# EAGLE board SIH26113_Maternity_Assist_Belt (EAGLE 9.6.2), part 1 of 2
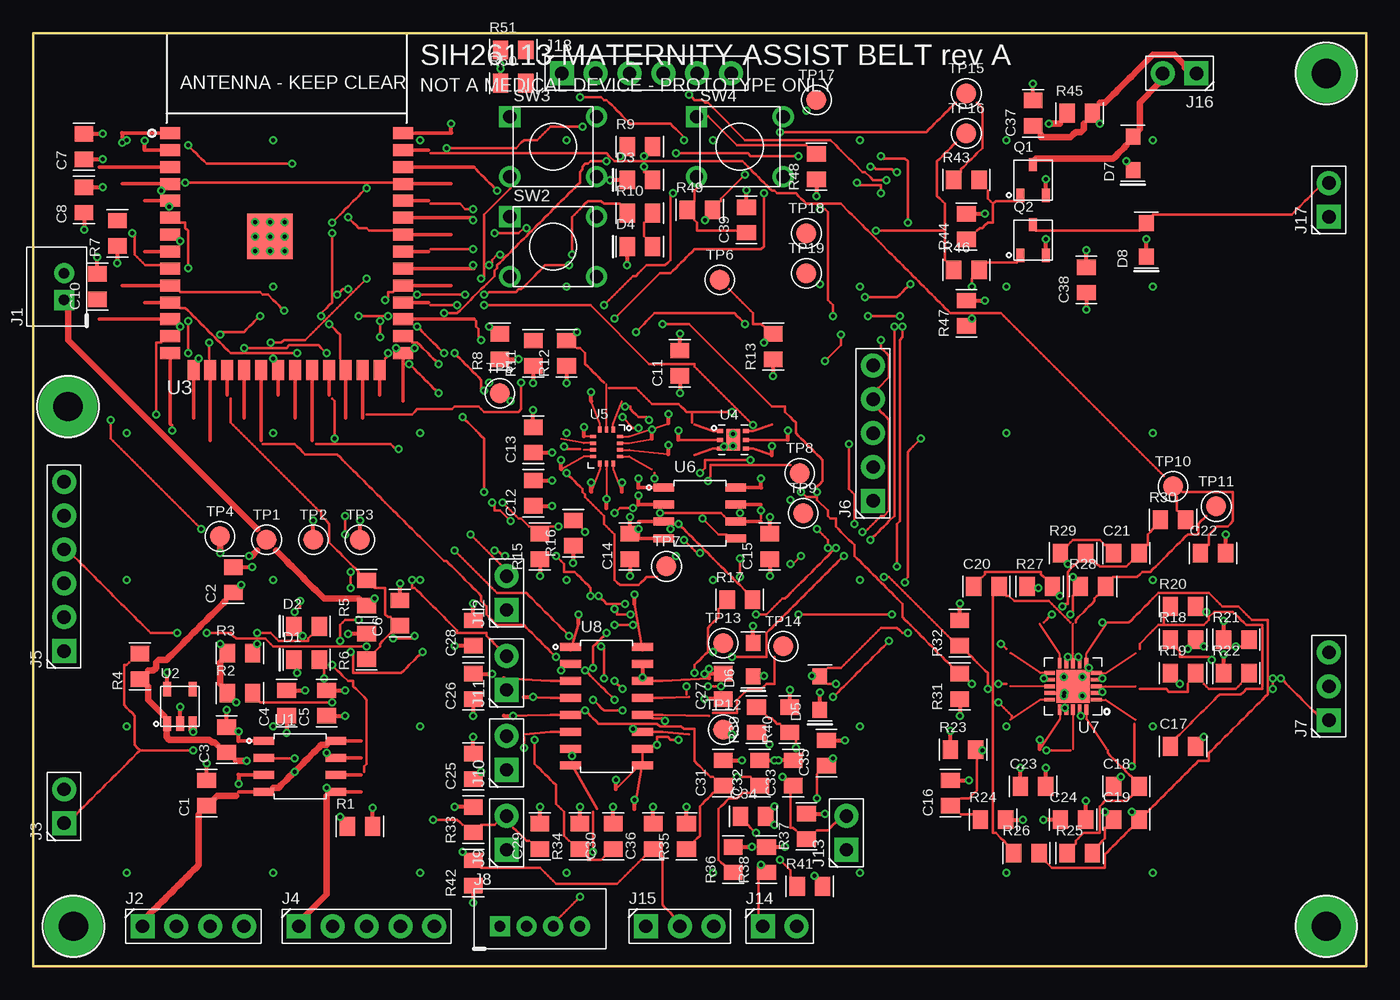
[diagram p0: board, top side]
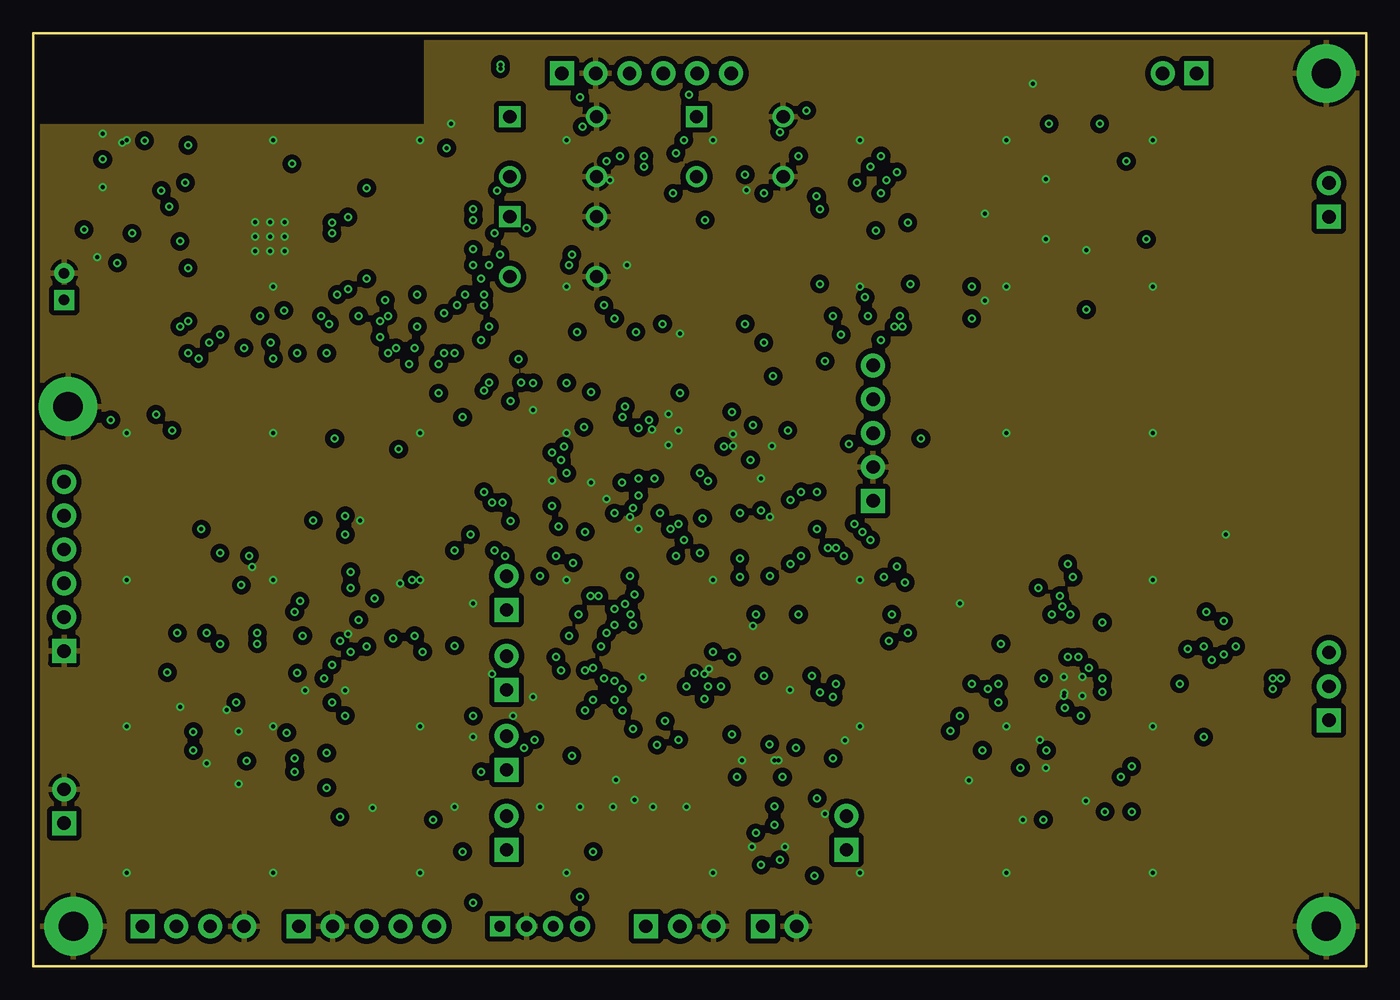
[diagram p1: board, inner layer Route2]
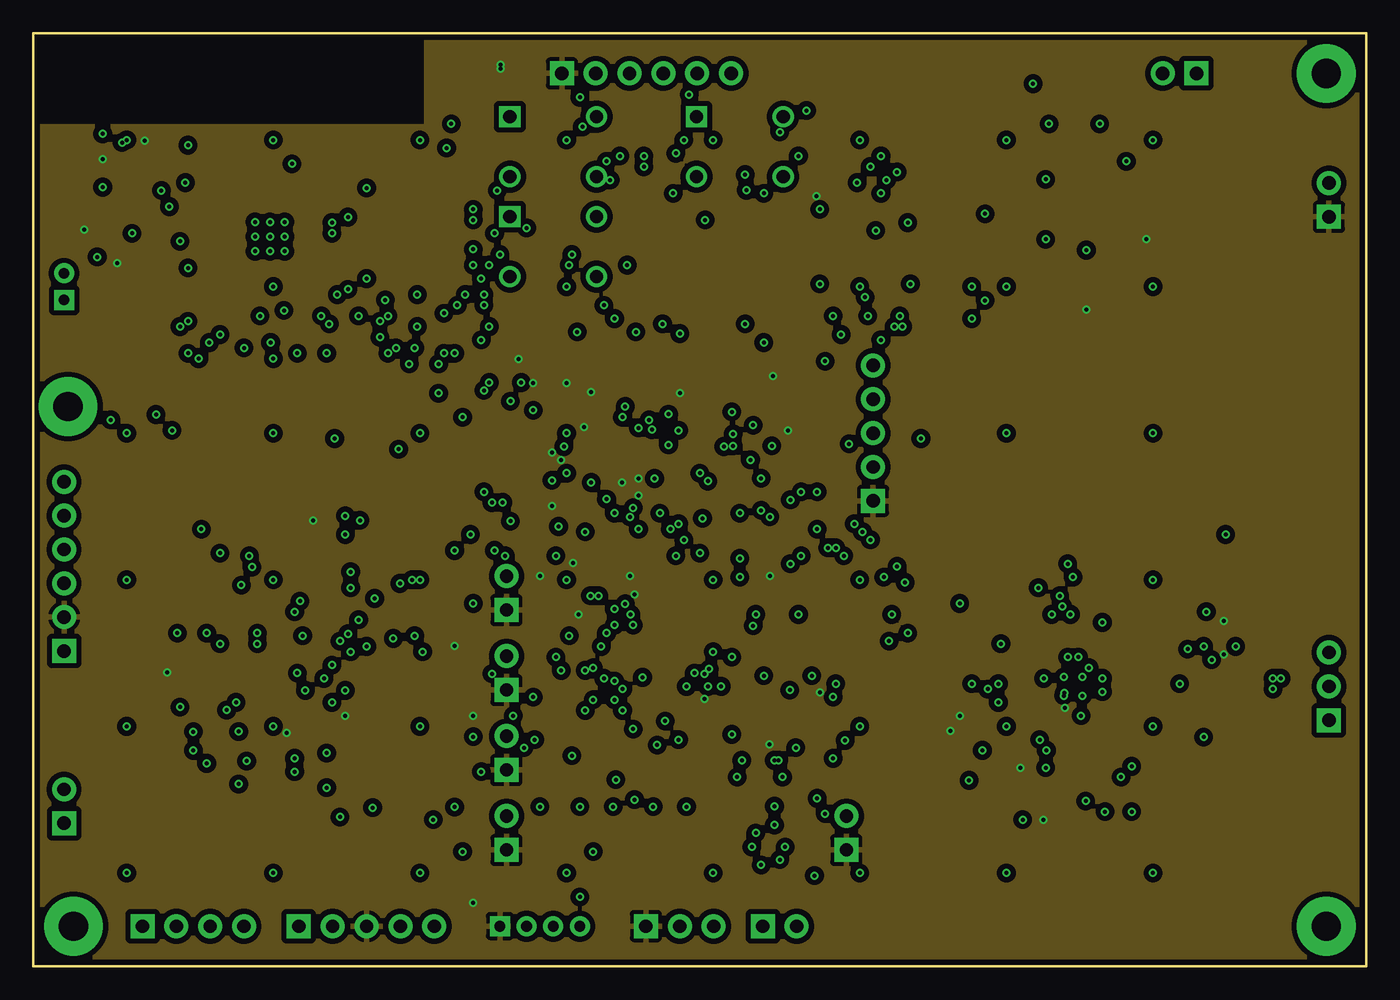
[diagram p2: board, inner layer Route15]
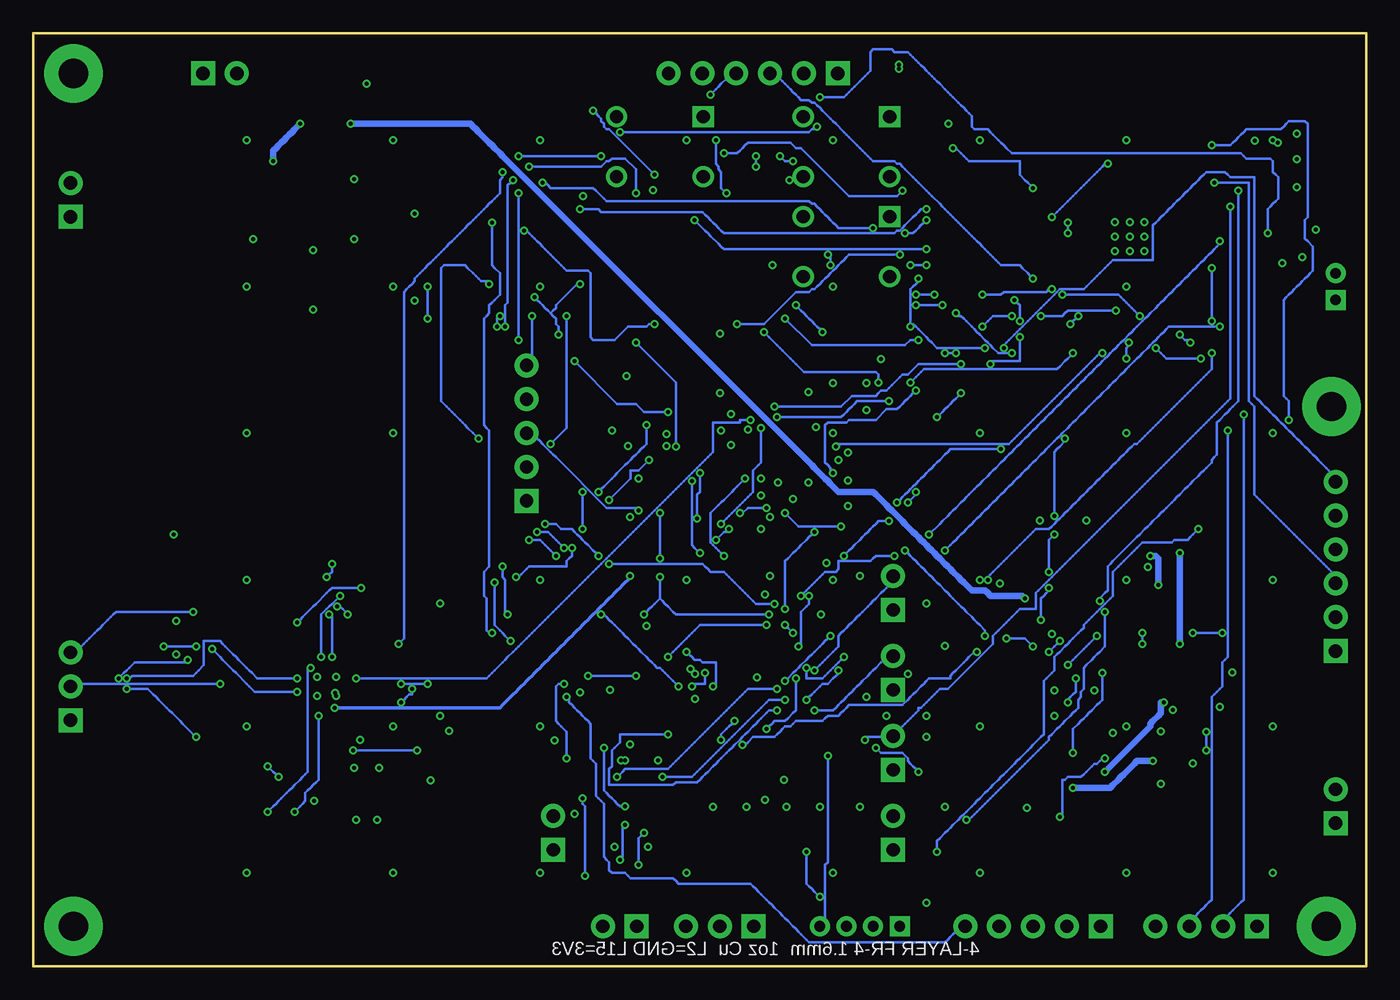
[diagram p3: board, bottom side, seen from below]

Size 100 x 70 mm. Coordinates in mm from the lower left corner, seen from the top.
Outline: 0,0 100,0 100,70 0,70 0,0
Copper layers (1*2*15*16): Top 0.035mm / dielectric 0.36mm / Route2 0.035mm / dielectric 0.71mm / Route15 / Bottom
Design rules "SIH26113_4layer": minimum track width 0.15mm, minimum drill 0.3mm, track to track 0.127mm, track to pad 0.127mm, pad to pad 0.127mm, via to via 0.127mm, smd to smd 0.127mm, copper to edge 0.4mm, drill to drill 0.25mm, minimum pad ring 0.25mm, minimum via ring 0.15mm, thermal gap 0.3mm
Net classes: 0 default: width 0.2 mm, drill 0.3 mm, clearance 0.15 mm; 1 power: width 0.5 mm, drill 0.4 mm, clearance 0.2 mm; 2 motor: width 0.5 mm, drill 0.4 mm, clearance 0.2 mm; 3 analog_ecg: width 0.2 mm, drill 0.3 mm, clearance 0.2 mm
tKeepout: 4 lines
bKeepout: 4 lines
tRestrict: 4 lines
bRestrict: 4 lines
vRestrict: 4 lines

## Footprints (pad centres in the part's own frame; a part is rotated, then mirrored left to right if it is on the bottom)
C0805 = smd 1.15 x 1.4: 1 -0.95,0; 2 0.95,0
LED0805 = smd 1.15 x 1.4: 1 -0.95,0; 2 0.95,0
SOD-123 = smd 1.2 x 1.1: 1 -1.25,0; 2 1.25,0
MOUNT-M2 = drill 2.2 pad 4.4: 1 0,0
JST-PH-2 = drill 0.8 pad 1.5 square: 1 -1,0 | drill 0.8 pad 1.5: 2 1,0
HDR-1X4 = drill 1 pad 1.8 square: 1 -3.81,0 | drill 1 pad 1.8: 2 -1.27,0; 3 1.27,0; 4 3.81,0
HDR-1X2 = drill 1 pad 1.8 square: 1 -1.27,0 | drill 1 pad 1.8: 2 1.27,0
HDR-1X5 = drill 1 pad 1.8 square: 1 -5.08,0 | drill 1 pad 1.8: 2 -2.54,0; 3 0,0; 4 2.54,0; 5 5.08,0
HDR-1X6 = drill 1 pad 1.8 square: 1 -6.35,0 | drill 1 pad 1.8: 2 -3.81,0; 3 -1.27,0; 4 1.27,0; 5 3.81,0; 6 6.35,0
HDR-1X3 = drill 1 pad 1.8 square: 1 -2.54,0 | drill 1 pad 1.8: 2 0,0; 3 2.54,0
JST-PH-4 = drill 0.8 pad 1.5 square: 1 -3,0 | drill 0.8 pad 1.5: 2 -1,0; 3 1,0; 4 3,0
SOT-23-3 = smd 0.6 x 1: 1 -0.95,-1.15; 2 0.95,-1.15; 3 0,1.15
R0805 = smd 1.15 x 1.4: 1 -0.95,0; 2 0.95,0
TACT-6X6-THT = drill 1 pad 1.6 square: 1 -3.25,2.25 | drill 1 pad 1.6: 2 -3.25,-2.25; 3 3.25,2.25; 4 3.25,-2.25
TESTPOINT-1.5 = smd 1.5 x 1.5: TP 0,0
SOIC-8-N = smd 1.55 x 0.6: 1 -2.7,1.905; 2 -2.7,0.635; 3 -2.7,-0.635; 4 -2.7,-1.905; 5 2.7,-1.905; 6 2.7,-0.635; 7 2.7,0.635; 8 2.7,1.905
SOT-23-5 = smd 0.6 x 1.1: 1 -0.95,-1.3; 2 0,-1.3; 3 0.95,-1.3; 4 0.95,1.3; 5 -0.95,1.3
ESP32-S3-WROOM-1 = smd 1.5 x 0.9: 1 -8.75,5.26; 2 -8.75,3.99; 3 -8.75,2.72; 4 -8.75,1.45; 5 -8.75,0.18; 6 -8.75,-1.09; 7 -8.75,-2.36; 8 -8.75,-3.63; 9 -8.75,-4.9; 10 -8.75,-6.17; 11 -8.75,-7.44; 12 -8.75,-8.71; 13 -8.75,-9.98; 14 -8.75,-11.25; 27 8.75,-11.25; 28 8.75,-9.98; 29 8.75,-8.71; 30 8.75,-7.44; 31 8.75,-6.17; 32 8.75,-4.9; 33 8.75,-3.63; 34 8.75,-2.36; 35 8.75,-1.09; 36 8.75,0.18; 37 8.75,1.45; 38 8.75,2.72; 39 8.75,3.99; 40 8.75,5.26 | smd 0.9 x 1.5: 15 -6.985,-12.5; 16 -5.715,-12.5; 17 -4.445,-12.5; 18 -3.175,-12.5; 19 -1.905,-12.5; 20 -0.635,-12.5; 21 0.635,-12.5; 22 1.905,-12.5; 23 3.175,-12.5; 24 4.445,-12.5; 25 5.715,-12.5; 26 6.985,-12.5 | smd 3.4 x 3.4: 41 -1.25,-2.5
WSON-6-DRV0006B = smd 0.45 x 0.3: 1 -0.975,0.65; 2 -0.975,0; 3 -0.975,-0.65; 4 0.975,-0.65; 5 0.975,0; 6 0.975,0.65 | smd 1 x 1.6: 7 0,0
LGA-14L-2.5X3.0 = smd 0.45 x 0.25: 1 1.025,0.75; 2 1.025,0.25; 3 1.025,-0.25; 4 1.025,-0.75; 8 -1.025,-0.75; 9 -1.025,-0.25; 10 -1.025,0.25; 11 -1.025,0.75 | smd 0.25 x 0.45: 5 0.5,-1.275; 6 0,-1.275; 7 -0.5,-1.275; 12 -0.5,1.275; 13 0,1.275; 14 0.5,1.275
LFCSP-20-4X4-P050 = smd 0.8 x 0.28: 1 -1.75,1; 2 -1.75,0.5; 3 -1.75,0; 4 -1.75,-0.5; 5 -1.75,-1; 11 1.75,-1; 12 1.75,-0.5; 13 1.75,0; 14 1.75,0.5; 15 1.75,1 | smd 0.28 x 0.8: 6 -1,-1.75; 7 -0.5,-1.75; 8 0,-1.75; 9 0.5,-1.75; 10 1,-1.75; 16 1,1.75; 17 0.5,1.75; 18 0,1.75; 19 -0.5,1.75; 20 -1,1.75 | smd 2.5 x 2.5: EP 0,0
SOP-16-N = smd 1.55 x 0.6: 1 -2.7,4.445; 2 -2.7,3.175; 3 -2.7,1.905; 4 -2.7,0.635; 5 -2.7,-0.635; 6 -2.7,-1.905; 7 -2.7,-3.175; 8 -2.7,-4.445; 9 2.7,-4.445; 10 2.7,-3.175; 11 2.7,-1.905; 12 2.7,-0.635; 13 2.7,0.635; 14 2.7,1.905; 15 2.7,3.175; 16 2.7,4.445

## Placement (x,y rotation side)
C1  10u  [C0805]  13,13 90 top
C2  10u  [C0805]  15,29 90 top
C3  10u  [C0805]  14.5,17 90 top
C4  10u  [C0805]  19,19.75 90 top
C5  100n  [C0805]  22,19.75 90 top
C6  100n  [C0805]  27.5,26.5 90 top
C7  100n  [C0805]  3.8,61.5 90 top
C8  22u  [C0805]  3.8,57.5 90 top
C10  1u  [C0805]  4.8,51 90 top
C11  100n  [C0805]  48.5,45.25 90 top
C12  100n  [C0805]  37.5,35.5 90 top
C13  100n  [C0805]  37.5,39.5 90 top
C14  100n  [C0805]  44.75,31.5 90 top
C15  1u  [C0805]  55.25,31.5 90 top
C16  100n  [C0805]  68.8,13 90 top
C17  1n  [C0805]  86.25,16.5 0 top
C18  220n  [C0805]  82,13.5 0 top
C19  220n  [C0805]  82,11 0 top
C20  8n2  [C0805]  71.5,28.5 0 top
C21  3n9  [C0805]  82,31 0 top
C22  10n  [C0805]  88.5,31 0 top
C23  100n  [C0805]  75,13.5 0 top
C24  1u  [C0805]  78,11 0 top
C25  100n  [C0805]  33,15 90 top
C26  100n  [C0805]  33,21 90 top
C27  100n  [C0805]  51.75,21 90 top
C28  10u  [C0805]  33,25 90 top
C29  10n  [C0805]  38,9.75 90 top
C30  10n  [C0805]  43.5,9.75 90 top
C31  10n  [C0805]  51.75,14.5 90 top
C32  10n  [C0805]  54.5,14.5 90 top
C33  10n  [C0805]  57,14.5 90 top
C34  100n/50V  [C0805]  54,11.25 0 top
C35  10n  [C0805]  59.5,16 90 top
C36  100n  [C0805]  46.5,9.75 90 top
C37  10u  [C0805]  75,64 90 top
C38  10u  [C0805]  79,51.5 90 top
C39  100n  [C0805]  53.5,56 90 top
D1  RED  [LED0805]  20.5,23 0 top
D2  GRN  [LED0805]  20.5,25.5 0 top
D3  GRN  [LED0805]  45.5,59 0 top
D4  RED  [LED0805]  45.5,54 0 top
D5  1N5819HW  [SOD-123]  59,20.5 90 top
D6  1N5819HW  [SOD-123]  54,23 90 top
D7  1N5819HW  [SOD-123]  82.5,61 90 top
D8  1N5819HW  [SOD-123]  83.5,54.5 90 top
H1  M2  [MOUNT-M2]  3,3 0 top
H2  M2  [MOUNT-M2]  97,3 0 top
H3  M2  [MOUNT-M2]  2.6,42 0 top
H4  M2  [MOUNT-M2]  97,67 0 top
J1  LI-PO 3.7V  [JST-PH-2]  2.3,51 90 top
J2  USB / 5V IN  [HDR-1X4]  12,3 0 top
J3  OFF SW  [HDR-1X2]  2.3,12 90 top
J4  FUEL GAUGE  [HDR-1X5]  25,3 0 top
J5  UART PROG  [HDR-1X6]  2.3,30 90 top
J6  AS5600 SIDE-B  [HDR-1X5]  63,40 90 top
J7  ECG ELECTRODES  [HDR-1X3]  97.2,21 90 top
J8  LOAD CELL  [JST-PH-4]  38,3 0 top
J9  FSR1  [HDR-1X2]  35.5,10 90 top
J10  FSR2  [HDR-1X2]  35.5,16 90 top
J11  FSR3  [HDR-1X2]  35.5,22 90 top
J12  FSR4  [HDR-1X2]  35.5,28 90 top
J13  STRETCH  [HDR-1X2]  61,10 90 top
J14  PIEZO  [HDR-1X2]  56,3 0 top
J15  HALL / LIMIT  [HDR-1X3]  48.5,3 0 top
J16  VIB MOTOR  [HDR-1X2]  86,67 180 top
J17  BUZZER  [HDR-1X2]  97.2,57.5 90 top
J18  MICROSD SPI  [HDR-1X6]  46,67 0 top
Q1  AO3400A  [SOT-23-3]  75,59 0 top
Q2  AO3400A  [SOT-23-3]  75,54.5 0 top
R1  2k4  [R0805]  24.5,10.5 0 top
R2  1k  [R0805]  15.5,20.5 0 top
R3  1k  [R0805]  15.5,23.5 0 top
R4  100k  [R0805]  8,22.5 90 top
R5  470k  [R0805]  25,28 90 top
R6  470k  [R0805]  25,24 90 top
R7  10k  [R0805]  6.3,55 90 top
R8  10k  [R0805]  35,46.5 90 top
R9  1k  [R0805]  45.5,61.5 0 top
R10  1k  [R0805]  45.5,56.5 0 top
R11  4k7  [R0805]  37.5,46 90 top
R12  4k7  [R0805]  40,46 90 top
R13  10k  [R0805]  55.5,46.5 90 top
R15  4k7  [R0805]  38,31.5 90 top
R16  4k7  [R0805]  40.5,32.5 90 top
R17  0R DNP  [R0805]  53,27.5 0 top
R18  330k  [R0805]  86.25,24.5 0 top
R19  330k  [R0805]  86.25,22 0 top
R20  330k  [R0805]  86.25,27 0 top
R21  10M  [R0805]  90.25,24.5 0 top
R22  10M  [R0805]  90.25,22 0 top
R23  10M  [R0805]  69.75,16.25 0 top
R24  10M  [R0805]  72,11 0 top
R25  10M  [R0805]  78.5,8.5 0 top
R26  1M  [R0805]  74.5,8.5 0 top
R27  470k  [R0805]  75.5,28.5 0 top
R28  100k  [R0805]  79.5,28.5 0 top
R29  1M  [R0805]  78,31 0 top
R30  1k  [R0805]  85.5,33.5 0 top
R31  100k  [R0805]  69.5,21 90 top
R32  100k  [R0805]  69.5,25 90 top
R33  10k  [R0805]  33,11 90 top
R34  10k  [R0805]  41,9.75 90 top
R35  10k  [R0805]  49,9.75 90 top
R36  10k  [R0805]  52.5,8 90 top
R37  10k  [R0805]  58,10.5 90 top
R38  10M  [R0805]  55,8 90 top
R39  1M  [R0805]  54.25,18.5 90 top
R40  1M  [R0805]  56.75,18.5 90 top
R41  100k  [R0805]  58.25,6 0 top
R42  10k  [R0805]  33,7 90 top
R43  100R  [R0805]  70,59 0 top
R44  100k  [R0805]  70,55.5 90 top
R45  0R  [R0805]  78.5,64 0 top
R46  100R  [R0805]  70,52.25 0 top
R47  100k  [R0805]  70,49 90 top
R48  10k  [R0805]  58.75,60 90 top
R49  1k  [R0805]  50,56.75 0 top
R50  10k  [R0805]  36,66.25 0 top
R51  10k  [R0805]  36,68.75 0 top
SW2  RESET  [TACT-6X6-THT]  39,54 0 top
SW3  BOOT  [TACT-6X6-THT]  39,61.5 0 top
SW4  SOS  [TACT-6X6-THT]  53,61.5 0 top
TP1  VBAT  [TESTPOINT-1.5]  17.5,32 0 top
TP2  3V3  [TESTPOINT-1.5]  21,32 0 top
TP3  GND  [TESTPOINT-1.5]  24.5,32 0 top
TP4  VBUS  [TESTPOINT-1.5]  14,32.25 0 top
TP5  IO3  [TESTPOINT-1.5]  35,43 0 top
TP6  TMP_ALERT  [TESTPOINT-1.5]  51.5,51.5 0 top
TP7  IMU_INT1  [TESTPOINT-1.5]  47.5,30 0 top
TP8  AS_OUT  [TESTPOINT-1.5]  57.5,37 0 top
TP9  AS_PGO  [TESTPOINT-1.5]  57.75,34 0 top
TP10  ECG_OUT  [TESTPOINT-1.5]  85.5,36 0 top
TP11  ECG_REF  [TESTPOINT-1.5]  88.75,34.5 0 top
TP12  HX_BASE  [TESTPOINT-1.5]  51.75,17.75 0 top
TP13  HX_XO  [TESTPOINT-1.5]  51.75,24.25 0 top
TP14  HX_DOUT  [TESTPOINT-1.5]  56.25,24 0 top
TP15  MOTOR_EN  [TESTPOINT-1.5]  70,65.5 0 top
TP16  BUZZER_EN  [TESTPOINT-1.5]  70,62.5 0 top
TP17  SOS_GPIO  [TESTPOINT-1.5]  58.75,65 0 top
TP18  I2C_SDA  [TESTPOINT-1.5]  58,55 0 top
TP19  I2C_SCL  [TESTPOINT-1.5]  58,52 0 top
U1  TP4056  [SOIC-8-N]  20,15 0 top
U2  AP2112K-3.3  [SOT-23-5]  11,19.5 0 top
U3  ESP32-S3-WROOM-1-N8R2  [ESP32-S3-WROOM-1]  19,57.25 0 top
U4  TMP117  [WSON-6-DRV0006B]  52.5,39.5 0 top
U5  LSM6DSOX  [LGA-14L-2.5X3.0]  43,39 0 top
U6  AS5600  [SOIC-8-N]  50,34 0 top
U7  AD8232  [LFCSP-20-4X4-P050]  78,21 180 top
U8  HX711  [SOP-16-N]  43,19.5 0 top

## Library data of the parts
C1-C8 C10-C39 D1-D8 H1-H4 J1-J18 Q1 Q2 R1-R13 R15-R51 SW2-SW4 TP1-TP19 U1-U8 = SIH26113_Maternity_Assist_Belt

## Nets
3V3 [power]: C4.1 C5.1 C7.1 C8.1 C11.1 C12.1 C13.1 C14.1 C15.1 C23.1 C24.1 C26.1 C27.1 C28.1 C38.1 D5.1 D8.1 J4.3 J5.2 J6.1 J8.1 J9.1 J10.1 J11.1 J12.1 J13.1 J15.1 J17.1 J18.1 R7.1 R8.1 R11.1 R12.1 R13.1 R15.1 R16.1 R21.1 R22.1 R23.1 R31.1 R39.1 R42.1 R48.1 R50.1 R51.1 TP2.TP U2.5 U3.2 U4.5 U5.5 U5.8 U5.11 U5.12 U6.1 U6.2 U7.17 U8.1 U8.3 U8.16
ANG2_OUT: J6.5 R17.1
ANG_SCL: J6.4 R16.2 U3.35 U6.7
ANG_SDA: J6.3 R15.2 U3.22 U6.6
AS_OUT: TP8.TP U6.3
AS_PGO: TP9.TP U6.5
BUZZ_G: Q2.1 R46.2 R47.1
BUZZ_N: D8.2 J17.2 Q2.3
BUZZER_EN: R46.1 TP16.TP U3.25
CHG_PROG: R1.1 U1.2
ECG_FR: R32.1 U3.32 U7.15
ECG_HPDRIVE: C18.1 U7.1
ECG_HPSENSE [analog_ecg]: C18.2 R25.1 U7.20
ECG_IAOUT [analog_ecg]: C19.1 R25.2 U7.19
ECG_LA [analog_ecg]: J7.1 R18.1
ECG_LA_F [analog_ecg]: R18.2 R21.2 U7.2
ECG_LOD_N: U3.29 U7.11
ECG_LOD_P: U3.28 U7.12
ECG_OPM [analog_ecg]: C21.1 R28.1 R29.1 U7.9
ECG_OPP [analog_ecg]: C20.1 R27.2 U7.7
ECG_OUT [analog_ecg]: C22.1 R30.2 TP10.TP U3.39
ECG_OUT_RAW [analog_ecg]: C21.2 R29.2 R30.1 U7.10
ECG_RA [analog_ecg]: J7.2 R19.1
ECG_RA_F [analog_ecg]: R19.2 R22.2 U7.3
ECG_REFIN [analog_ecg]: C16.1 R23.2 R24.1 U7.18
ECG_REFOUT [analog_ecg]: C20.2 R26.1 R28.2 TP11.TP U7.8
ECG_RL [analog_ecg]: J7.3 R20.2
ECG_RLD [analog_ecg]: C17.1 R20.1 U7.5
ECG_RLDFB: C17.2 U7.4
ECG_SDN: R31.2 U3.30 U7.13
ECG_SW [analog_ecg]: C19.2 R26.2 R27.1 U7.6
ESP_EN: C10.1 J5.5 R7.2 SW2.1 SW2.2 U3.3
ESP_IO0: J5.6 R8.2 SW3.1 SW3.2 U3.27
FSR1_ADC: C29.1 J9.2 R33.1 U3.4
FSR2_ADC: C30.1 J10.2 R34.1 U3.5
FSR3_ADC: C31.1 J11.2 R35.1 U3.6
FSR4_ADC: C32.1 J12.2 R36.1 U3.7
GND [power]: C1.2 C2.2 C3.2 C4.2 C5.2 C6.2 C7.2 C8.2 C10.2 C11.2 C12.2 C13.2 C14.2 C15.2 C16.2 C22.2 C23.2 C24.2 C25.2 C26.2 C27.2 C28.2 C29.2 C30.2 C31.2 C32.2 C33.2 C35.2 C36.2 C37.2 C38.2 C39.2 D3.1 D4.1 D6.2 H1.1 H2.1 H3.1 H4.1 J1.2 J2.4 J3.2 J4.2 J5.1 J6.2 J8.2 J14.2 J15.3 J18.2 Q1.2 Q2.2 R1.2 R6.2 R24.2 R32.2 R33.2 R34.2 R35.2 R36.2 R37.2 R38.2 R40.2 R44.2 R47.2 SW2.3 SW2.4 SW3.3 SW3.4 SW4.3 SW4.4 TP3.TP U1.1 U1.3 U2.2 U3.1 U3.40 U3.41 U4.2 U4.4 U4.7 U5.1 U5.2 U5.3 U5.6 U5.7 U6.4 U6.8 U7.14 U7.16 U7.EP U8.4 U8.5 U8.9 U8.10 U8.14 U8.15
HALL_LIMIT: C36.1 J15.2 R42.2 U3.34
HX_BASE: TP12.TP U8.2
HX_DOUT: TP14.TP U3.23 U8.12
HX_SCK: U3.31 U8.11
HX_VBG: C25.1 U8.6
HX_XO: TP13.TP U8.13
I2C_SCL: J4.5 R12.2 TP19.TP U3.9 U4.1 U5.13
I2C_SDA: J4.4 R11.2 TP18.TP U3.8 U4.6 U5.14
IMU_INT1: TP7.TP U3.10 U5.4
IMU_INT2: U3.11 U5.9
IMU_OCS_AUX: U5.10
IO3_SPARE: R17.2 TP5.TP U3.15
LC_A_N: J8.4 U8.7
LC_A_P: J8.3 U8.8
LDO_EN: J3.1 R4.2 U2.3
LDO_NC: U2.4
LED_ALERT: R10.1 U3.16
LED_ALERT_A: D4.2 R10.2
LED_CHRG_A: D1.2 R2.2
LED_CHRG_K: D1.1 U1.7
LED_STATUS: R9.1 U3.26
LED_STATUS_A: D3.2 R9.2
LED_STDBY_A: D2.2 R3.2
LED_STDBY_K: D2.1 U1.6
MOTOR_EN: R43.1 TP15.TP U3.24
MOTOR_G: Q1.1 R43.2 R44.1
MOTOR_N [motor]: D7.2 J16.2 Q1.3
MOTOR_P [motor]: C37.1 D7.1 J16.1 R45.2
PIEZO_AC: C34.2 R39.2 R40.1 R41.1
PIEZO_ADC: C35.1 D5.2 D6.1 R41.2 U3.38
PIEZO_IN: C34.1 J14.1 R38.1
SD_CS: J18.6 R50.2 U3.18
SD_MISO: J18.5 R51.2 U3.21
SD_MOSI: J18.4 U3.19
SD_SCK: J18.3 U3.20
SOS_BTN: C39.1 R48.2 R49.1 SW4.1 SW4.2
SOS_GPIO: R49.2 TP17.TP U3.33
STRETCH_ADC: C33.1 J13.2 R37.1 U3.12
TMP_ALERT: R13.2 TP6.TP U4.3
UART_RX: J5.4 U3.36
UART_TX: J5.3 U3.37
USB_DM: J2.2 U3.13
USB_DP: J2.3 U3.14
VBAT [power]: C2.1 C3.1 J1.1 J4.1 R4.1 R5.1 R45.1 TP1.TP U1.5 U2.1
VBAT_SENSE: C6.1 R5.2 R6.1 U3.17
VBUS [power]: C1.1 J2.1 R2.1 R3.1 TP4.TP U1.4 U1.8

## Tracks (layer width: path | path; a pad name or v marks a point on that pad's centre or on a via)
3V3  (via drill 0.3 pad 0.55, 0.3 pad 0.6)
  Top 0.15: U5.5 43.5,37.3 44.15,35.6 | U5.8 41.3,38.25 39.6,37.27 | U5.11 41.3,39.75 | U5.12 42.5,40.7 41.85,42.4
  Top 0.2: U4.5 54,39.5 56.6,39.5 | U8.1 40.3,23.7 40.9,25.7 | U8.16 45.7,23.7 45.1,27.2 | U8.3 38.8,21.41 35.3,21.6
  Top 0.25: U3.2 8.35,61.24 | U6.1 45.4,35.91 | U6.2 45.4,34.63
  Top 0.3: U2.5 v10.05,22.05 | C4.1 v19,17.52 | C5.1 v23.4,18.8 | TP2.TP v21,33.45 | 8.35,61.24 v8.35,61.94 | C7.1 v5.2,60.55 | C8.1 v3.8,55.27 | R7.1 v6.3,52.77 | R8.1 v36.4,45.55 | R11.1 v37.5,43.77 | R12.1 v40,43.77 | 56.6,39.5 v56.6,40.2 | C11.1 v48.5,43.02 | R13.1 v55.5,44.27 | 44.15,35.6 v44.15,36.3 | 39.6,37.27 v39.6,37.98 | 41.3,39.75 v41.3,40.45 | 41.85,42.4 v41.85,43.1 | C12.1 v38.9,34.55 | C13.1 v38.9,38.55 | R15.1 v38,29.27 | R16.1 v40.5,30.27 | 45.4,35.91 v45.4,36.6 | 45.4,34.63 v45.4,35.34 | C14.1 v44.75,29.27 | C15.1 v55.25,29.27 | R21.1 v89.3,25.9 | R22.1 v89.3,23.4 | R23.1 v68.8,17.65 | R31.1 v69.5,18.77 | C23.1 v74.05,14.9 | C24.1 v75.78,11 | 40.9,25.7 v40.9,26.4 | 35.3,21.6 v35.3,20.9 | 45.1,27.2 v45.1,27.9 | C26.1 v33,18.77 | C27.1 v50.35,20.05 | C28.1 v31.6,24.05 | R39.1 v55.24,16.64 | D5.1 v59,20.55 | R42.1 v33,4.78 | D8.1 v83.5,54.55 | C38.1 v79,49.27 | R48.1 v58.75,57.77 | R50.1 v35.05,67.65 | R51.1 v35.05,67.35
  Bottom 0.25: v77.4,19.4 65,19.4 64.8,19.6 64.6,19.8 64.4,20 64.2,20.2 64,20.4 63.8,20.6 63.6,20.8 63.4,21 63.2,21.2 63,21.4 62.8,21.6 62.6,21.8 62.4,22 62.2,22.2 62,22.4 61.8,22.6 61.6,22.8 61.4,23 61.2,23.2 61,23.4 60.8,23.6 60.6,23.8 60.4,24 60.2,24.2 60,24.4 59.8,24.6 59.6,24.8 59.4,25 59.2,25.2 59,25.4 58.8,25.6 58.6,25.8 58.4,26 58.2,26.2 58,26.4 57.8,26.6 57.6,26.8 57.4,27 57.2,27.2 57,27.4 56.8,27.6 56.6,27.8 56.4,28 56.2,28.2 56,28.4 55.8,28.6 55.6,28.8 55.4,29
  pour Route15 (isolate 0.4): 0.5,0.5 99.5,0.5 99.5,69.5 29.5,69.5 29.5,63 0.5,63
ANG2_OUT  (via drill 0.3 pad 0.6)
  Top 0.2: 51.4,26.8 51.4,26.2 51.2,26 51,25.8 50.8,25.6 50.6,25.4 50.6,23.6 50.4,23.4 50.2,23.2 50,23 49.8,22.8 49.6,22.6 v49.6,22 | v50.6,21 v51.6,21 | v57.4,26.4 v64.4,26.4 | v64.8,30 64.8,33.2 65,33.4 65,47 65.2,47.2 v65.2,48 | v65,48.8 v62.6,48.8
  Bottom 0.2: v49.6,22 49.6,21.2 50.4,21.2 v50.6,21 | v51.6,21 51.8,21.2 52,21.4 52.4,21.8 52.6,22 52.8,22.2 53,22.4 53.2,22.4 53.4,22.6 53.6,22.8 53.8,23 54,23.2 54.4,23.6 54.6,23.8 54.8,24 55,24.2 55.4,24.6 55.6,24.8 55.8,25 56,25.2 56.4,25.6 56.6,25.8 56.8,26 57,26.2 57.2,26.4 v57.4,26.4 | v64.4,26.4 64.6,26.6 64.6,29 64.8,29.2 v64.8,30 | v65.2,48 65.2,48.6 v65,48.8 | v62.6,48.8 62.6,45.8
ANG_SCL  (via drill 0.3 pad 0.6)
  Top 0.2: 53,34.4 v53,34 | v53,30.6 v53,29.2 | v54.2,26.4 55,26.4 55.4,26.8 55.6,27 55.8,27.2 56,27.4 56.2,27.6 56.4,27.6 56.6,27.8 56.8,28 57,28.2 57.4,28.6 57.6,28.8 57.8,29 58,29.2 58.4,29.6 58.6,29.8 58.8,30 59,30.2 59.4,30.6 59.6,30.8 59.8,31 60,31.2 v60.2,31.4 | v62.2,32.6 62.4,32.6 62.6,32.8 62.8,33 63,33.2 63.2,33.4 63.4,33.6 63.6,33.8 63.8,33.8 64.2,34.2 64.2,41 64,41.2 63.8,41.4 63.6,41.6 63.4,41.8 | 41.2,32.8 v41.4,32.6 | v43.6,26.8 43.8,26.6 43.8,26.4 v44.8,26.4 | v34.6,55 36.4,55 36.8,55.4 v37,55.4 | v61.8,58.8 62,58.6 63.6,58.6 v63.6,58 | v63.6,47 63.6,46.4 63.8,46.2 64,46 64.2,45.8 64.2,44.2 63.4,43.4
  Top 0.25: U3.35 33.05,56.16 | U6.7 54.6,34.63
  Bottom 0.2: v53,34 v53,30.6 | v53,29.2 53,27.6 | 53,27.6 53.4,27.2 53.6,27 53.8,26.8 54,26.6 v54.2,26.4 | v60.2,31.4 60.4,31.6 60.6,31.8 60.8,32 61,32.2 61.2,32.4 61.4,32.6 v62.2,32.6 | v41.4,32.6 41.6,32.4 41.8,32.2 42,32 42.4,31.6 42.6,31.4 42.8,31.2 43,31 43.4,30.6 43.6,30.4 v43.6,26.8 | v44.8,26.4 51.8,26.4 52,26.6 52.4,27 52.6,27.2 52.8,27.4 53,27.6 | v33,56 33.2,55.8 33.4,55.6 33.6,55.4 33.8,55.2 34,55 v34.6,55 | v37,55.4 39.6,55.4 39.8,55.6 40,55.8 40.2,56 40.4,56.2 40.6,56.4 40.8,56.6 41,56.8 41.2,57 41.4,57.2 41.6,57.2 41.8,57.4 57,57.4 57.2,57.6 57.8,58.2 58,58.4 61.2,58.4 61.4,58.6 61.6,58.8 v61.8,58.8 | v63.6,58 v63.6,47
ANG_SDA  (via drill 0.3 pad 0.6)
  Top 0.2: 54.6,33.6 v54.6,34.2 | 38.8,33 v39.4,33 | v43.6,34 44,34.4 v45,34.4 | v47,34 51.6,34 51.8,33.8 52,33.6 | 21.2,39.2 26.8,39.2 27,39 27.2,38.8 v27.4,38.8 | v35.2,34.8 35.4,34.6 35.6,34.4 35.8,34.2 36,34 36.2,33.8 36.4,33.6 36.6,33.6 37.2,33
  Top 0.25: U3.22 20.91,39.45 | U6.6 54.6,33.37
  Bottom 0.2: v54.6,34.2 54.6,34.4 57,34.4 60.8,38.2 61,38.4 61.2,38.6 61.8,39.2 62,39.4 62.2,39.6 | v39.4,33 42.6,33 v43.6,34 | v45,34.4 46.4,34.4 46.8,34 v47,34 | v27.4,38.8 31.2,38.8 31.4,38.6 31.6,38.4 32,38 32.2,37.8 32.4,37.6 32.6,37.4 32.8,37.2 33,37 33.2,36.8 33.4,36.6 33.6,36.4 33.8,36.2 34,36 34.2,35.8 34.4,35.6 34.6,35.4 34.8,35.2 35,35 v35.2,34.8
AS_OUT  (via drill 0.3 pad 0.6)
  Top 0.2: 47.8,33 v47.8,32.8 | v48.8,32 49,31.8 49.4,31.4 49.6,31.2 49.8,31 v50,31 | v50.6,36.4 50.6,36.6 50.8,36.8 50.8,37.6 56.8,37.6
  Top 0.25: U6.3 45.4,33.37
  Bottom 0.2: v47.8,32.8 47.8,32.6 48.2,32.6 v48.8,32 | v50,31 50.2,31.2 50.4,31.4 50.6,31.6 v50.6,36.4
AS_PGO  (via drill 0.3 pad 0.6)
  Top 0.2: 52,32.4 51.4,32.4 v50.2,33.6 | v50,37 50.2,37.2 50.4,37.4 50.4,38 v53.8,38 | v56.8,35 57,34.8
  Bottom 0.2: v50.2,33.6 50.2,35.4 50,35.6 v50,37 | v53.8,38 54.6,37.2 55.2,37.2 55.2,36.6 v56.8,35
BUZZ_G  (via drill 0.3 pad 0.6)
  Top 0.2: 70.4,51.6 v70.4,51 | 73.8,52.8 71.6,52.8
  Bottom 0.2: v70.4,51 v70.4,48.6
BUZZ_N
  Top 0.2: 84,56.4 94.4,56.4 94.6,56.6 94.8,56.8 95,57 95.4,57.4 95.6,57.6 95.8,57.8 96,58 96.4,58.4 | 75.2,55.2 83,55.2
BUZZER_EN  (via drill 0.3 pad 0.6)
  Top 0.2: 68.4,53 68.4,57.2 68.2,57.4 68,57.6 67.8,57.8 67.8,60.4 68,60.6 68.2,60.8 68.4,61 68.6,61.2 68.8,61.4 69,61.6 69.2,61.8 | 25,41.4 28.4,41.4 28.6,41.6 28.8,41.8 31.4,41.8 31.6,42 33.4,42 33.6,41.8 33.8,41.6 36.4,41.6 36.6,41.8 v36.6,43.8 | v45.2,47.6 45.8,48.2 46,48.4 46.2,48.6 46.6,49 52.6,49 52.8,48.8 53,48.6 53.2,48.4 v53.4,48.2 | v63.2,55.2 68.4,55.2
  Top 0.25: U3.25 24.71,41.15
  Bottom 0.2: v36.6,43.8 36.6,44.4 36.8,44.6 42.2,44.6 42.8,45.2 43,45.4 43.2,45.6 43.8,46.2 44,46.4 44.2,46.6 44.8,47.2 45,47.4 v45.2,47.6 | v53.4,48.2 53.8,48.2 54,48 55.4,48 56.4,47 58,47 58.2,47.2 58.2,52 58.4,52.2 60,52.2 60.2,52.4 60.4,52.6 60.6,52.8 60.8,53 61,53.2 61.2,53.4 61.4,53.6 61.6,53.8 61.8,54 62,54.2 62.2,54.4 62.4,54.6 62.6,54.8 62.8,55 63,55.2 v63.2,55.2
CHG_PROG  (via drill 0.3 pad 0.6)
  Top 0.2: 18,15.6 v19.6,15.6
  Bottom 0.2: v19.6,15.6 19.8,15.6 20,15.4 20.2,15.2 20.4,15.2 20.6,15 21,14.6 21.2,14.4 21.4,14.2 22.4,14.2 22.6,14 22.8,14 22.8,11.4 v23,11.2
ECG_FR  (via drill 0.3 pad 0.6)
  Top 0.15: U7.15 75.55,20 73.3,18.5
  Top 0.2: 73.4,18.6 73.4,18.8 73.2,19 73,19.2 72.8,19.4 72.6,19.6 v72.4,19.8 | v71.6,20.8 71.6,22 71.4,22.2 70.8,22.8 70.6,23 70.4,23.2 70.2,23.4 | v34.2,52.6 34.4,52.8 34.4,53 34.8,53.4 v35,53.4 | v47.2,48.2 49.2,48.2 55.4,42 56.4,42 56.4,41.6 56.8,41.2 57,41 57.2,40.8 57.2,40 57.4,39.8 57.6,39.6 57.8,39.4 58,39.2 58.2,39 58.4,38.8 58.6,38.6 58.8,38.4 59,38.2 59.2,38 59.2,36.4 59,36.2 58.8,36 v58.8,35.6 | v58.8,32.8 59,32.6 59.2,32.4 59.4,32.2 59.6,32 v59.6,31.4 | v63.8,29.2 64.2,29.2 64.4,29 64.6,28.8 64.8,28.6 65.2,28.2 65.4,28 65.6,27.8 65.8,27.6 66.2,27.2 66.4,27 66.6,26.8 66.8,26.6 67.2,26.2 67.4,26 67.6,25.8 67.8,25.6 68.2,25.2 68.4,25 68.6,24.8 68.8,24.6
  Top 0.25: U3.32 33.05,52.35
  Bottom 0.2: v72.4,19.8 72.2,20 72,20.2 71.8,20.4 71.6,20.4 v71.6,20.8 | v33,52.6 v34.2,52.6 | v35,53.4 38.8,53.4 39,53.2 39.2,53 39.4,52.8 39.6,52.6 39.8,52.4 40,52.2 40.2,52 40.4,51.8 40.6,51.6 40.8,51.4 41,51.2 41.2,51 41.4,50.8 41.6,50.8 41.8,50.6 42.8,50.6 45.2,48.2 v47.2,48.2 | v58.8,35.6 v58.8,32.8 | v59.6,31.4 59.6,30.8 59.8,30.6 60,30.4 60,30 62.8,30 63,29.8 63.4,29.4 63.6,29.2 v63.8,29.2
ECG_HPDRIVE  (via drill 0.3 pad 0.6)
  Top 0.15: U7.1 80.45,20 82.7,18.5
  Top 0.2: 82.6,18.2 82.6,15.2 v82.4,15
  Bottom 0.2: v82.4,15 82,14.6 81.8,14.4 v81.6,14.2
ECG_HPSENSE
  Top 0.15: U7.20 79,18.55 80.5,16.3
  Top 0.2: 80.6,16.2 80.6,16 80.8,15.8 81,15.6 81.2,15.4 81.4,15.2 81.6,15 81.8,14.8 82,14.6 82.2,14.4 82.4,14.2 | 78.2,9.2 78.2,9.4 78.4,9.6 78.8,10 80,10 80,12 80.2,12.2 80.4,12.4 82,12.4 82.2,12.6 82.4,12.8
ECG_IAOUT  (via drill 0.3 pad 0.6)
  Top 0.2: 80.4,9.6 80.4,10.4 80.4,9.6 | 80.4,9.6 80.2,9.4 | 80.2,9.4 80,9.2 80.2,9.4 | 80.4,9.6 80.2,9.4
  Bottom 0.2: v78.6,18.8 78.6,14 78.8,13.8 79,13.6 79.2,13.4 79.4,13.2 79.6,13 79.6,12.4 79.8,12.2 80,12 v80.4,11.6
ECG_LA  (via drill 0.3 pad 0.6)
  Top 0.2: 85.8,23.8 86,23.6 86,23.2 88.2,23.2 v88.4,23 | v93.6,21.6 93.8,21.4 94,21.2 94.2,21 94.8,20.4 95,20.2 95.2,20 95.8,19.4 96,19.2 96.2,19 96.4,18.8
  Bottom 0.2: v88.4,23 88.6,22.8 92.4,22.8 92.8,22.4 93,22.2 93.2,22 v93.6,21.6
ECG_LA_F  (via drill 0.3 pad 0.6)
  Top 0.2: 90.6,24 v90.2,24
  Bottom 0.2: v90.2,24 v87.8,24 | v80.2,20.6 83.4,20.6 83.8,21 84,21.2 84.8,22 85,22.2 85.8,23 86,23.2 v86.6,23.8
ECG_LOD_N  (via drill 0.3 pad 0.6)
  Top 0.15: U7.11 75.55,22 73.3,23.5
  Top 0.2: 73,23.8 72.8,24 v72.6,24.2 | v64.8,59.6 64.6,59.6 64.4,59.8 63.2,59.8 63,60 v62.8,60 | v54.8,58 54.8,54 54.6,53.8 49.6,53.8 49.4,53.6 49.2,53.4 49,53.2 48.8,53 48.6,52.8 48.4,52.6 48.2,52.4 48,52.2 47.8,52 47,52 v43.6,48.6 | v33.6,47 33.4,47.2 33.4,47.8 33.2,48 33.2,48.4
  Top 0.25: U3.29 33.05,48.54
  Bottom 0.2: v72.6,24.2 72.2,24.6 72.2,50.6 72,50.8 71.8,51 71.6,51.2 71.4,51.4 71.4,51.6 71.2,51.8 71,52 70.8,52.2 70.6,52.4 70.4,52.6 70.2,52.8 70,53 69.8,53.2 69.6,53.4 69.4,53.6 69.2,53.8 69,54 68.8,54.2 68.6,54.4 68.4,54.6 68.2,54.8 68,55 67.8,55.2 67.6,55.4 67.4,55.6 67.2,55.8 67,56 66.8,56.2 66.6,56.4 66.4,56.6 66.2,56.8 66,57 65.8,57.2 65.6,57.4 65.4,57.6 65.2,57.8 65,58 65,59 64.8,59.2 v64.8,59.6 | v62.8,60 57.4,60 57,60.4 56.8,60.4 56.6,60.6 55.6,60.6 54.8,59.8 v54.8,58 | v43.6,48.6 41.6,46.6 34.6,46.6 34.2,47 v33.6,47
ECG_LOD_P  (via drill 0.3 pad 0.6)
  Top 0.2: v46.2,41 46,41.2 45.4,41.2 45.2,41.4 45,41.6 44.8,41.8 44.8,42 v44.4,42 | v30.4,45.2 30.2,45.4 30,45.6 29.8,45.8 29.6,46 29.2,46.4 29,46.6 28.8,46.8 28.4,46.8
  Bottom 0.2: v75.8,21.6 66,21.6 65.8,21.8 65.6,22 65.4,22.2 64.8,22.8 64.6,23 64.4,23.2 64,23.6 63.8,23.8 63.6,24 63.4,24.2 63,24.6 62.8,24.8 62.6,25 62.4,25.2 62,25.6 61.8,25.8 61.6,26 61.4,26.2 61,26.6 60.8,26.8 60.6,27 60.4,27.2 60,27.6 59.8,27.8 59.6,28 59.4,28.2 59,28.6 58.8,28.8 58.6,29 58.4,29.2 58,29.6 57.8,29.8 57.6,30 57.4,30.2 57,30.6 56.8,30.8 56.6,31 56.4,31.2 56,31.6 55.8,31.8 55.6,32 55.4,32.2 55.2,32.4 55,32.6 54.8,32.8 54.6,33 54.4,33.2 54.2,33.4 54,33.6 53.8,33.8 53.6,34 53.4,34.2 53.2,34.4 53,34.6 52.8,34.8 52.6,35 52.4,35.2 52.2,35.4 52,35.6 51.8,35.8 51.6,36 51.4,36.2 51.2,36.4 51,36.6 50.8,36.8 50.6,37 50.4,37.2 50.2,37.4 50,37.6 49.8,37.8 49.6,38 49.4,38.2 49.2,38.4 49,38.6 49,40.8 47,40.8 47,41 v46.2,41 | v44.4,42 39.4,42 38.6,42.8 36.8,42.8 36.6,43 36.4,43.2 36,43.2 35.8,43.4 35.6,43.6 35,44.2 34.8,44.4 34.4,44.4 33.6,45.2 v30.4,45.2
ECG_OPM  (via drill 0.3 pad 0.6)
  Top 0.2: 77.6,30.4 v77.6,30.2 | 80.4,31.6 80,32 78,32 77.8,31.8 77.6,31.6 | v77.8,26.4 78,26.4 78,27.8
  Bottom 0.2: v77.6,30.2 77.6,29.6 77.8,29.4 v78,29.2 | v77.6,23.2 77.6,26.2 v77.8,26.4
ECG_OPP  (via drill 0.3 pad 0.6)
  Top 0.2: 71.4,29.4 71.2,29.2 71.4,29.4 | 71.4,29.4 71.4,29.6 | 71.4,29.6 75.6,29.6 | 75.6,29.6 75.6,29.4 | 75.6,29.4 75.8,29.2 75.6,29.4 | 71.4,29.4 71.4,29.6 | 71.4,29.6 75.6,29.6 | 75.6,29.6 75.6,29.4
  Bottom 0.2: v78.4,23.2 78.4,26.4 78,26.8 77.8,27 77.6,27.2 v77,27.8
ECG_OUT
  Top 0.2: 85.8,34.2 85.8,35.2 | 88.2,31.6 88.2,32.4 88.6,32.8 88.8,33 89.6,33 89.8,33.2 90,33.4 90,35.6 86.2,35.6 | 29.8,61 43,61 43.2,60.8 43.6,60.4 53.2,60.4 53.4,60.2 53.6,60 53.8,59.8 54,59.6 54.2,59.4 54.4,59.2 54.6,59 54.8,58.8 55,58.6 55.2,58.4 55.4,58.2 55.6,58.2 55.8,58 57.2,58 57.4,57.8 57.6,57.6 57.8,57.4 58,57.2 60.6,57.2 61.2,56.6 61.4,56.4 61.6,56.2 62.2,55.6 62.4,55.4 62.6,55.2 63.2,54.6 63.4,54.4 63.6,54.2 64.2,53.6 64.4,53.4 64.6,53.2 64.8,53 65,52.8 65.2,52.6 65.4,52.4 65.6,52.2 65.8,52 66,51.8 66.2,51.6 66.4,51.4 66.6,51.2 66.8,51 67,50.8 67.2,50.6 67.4,50.4 67.6,50.2 67.8,50 68,49.8 68.2,49.6 68.4,49.4 68.6,49.2 68.8,49 72.6,49 72.8,48.8 73,48.6 73.2,48.4 73.6,48 73.8,47.8 74,47.6 74.2,47.4 74.6,47 74.8,46.8 75,46.6 75.2,46.4 75.6,46 75.8,45.8 76,45.6 76.2,45.4 76.6,45 76.8,44.8 77,44.6 77.2,44.4 77.6,44 77.8,43.8 78,43.6 78.2,43.4 78.6,43 78.8,42.8 79,42.6 79.2,42.4 79.6,42 79.8,41.8 80,41.6 80.2,41.4 80.6,41 80.8,40.8 81,40.6 81.2,40.4 81.6,40 81.8,39.8 82,39.6 82.2,39.4 82.6,39 82.8,38.8 83,38.6 83.2,38.4 83.6,38 83.8,37.8 84,37.6 84.2,37.4 84.4,37.2 84.6,37 84.8,36.8
  Top 0.25: U3.39 29.65,61.24
ECG_OUT_RAW  (via drill 0.3 pad 0.6)
  Top 0.15: U7.10 77,23.45 75.5,25.7
  Top 0.2: 83.6,32.4 83.6,31.6 83.6,32.4 | 83.6,32.4 83.8,32.6 | 83.8,32.6 84,32.8 83.8,32.6 | 79.8,30.2 79.6,30.4 79.8,30.2 | 79.8,30.2 80,30 | 80,30 82,30 | 82,30 82.2,30.2 | 82.2,30.2 82.4,30.4 82.2,30.2 | 83.6,32.4 83.8,32.6 | 79.8,30.2 80,30 | 80,30 82,30 | 82,30 82.2,30.2 | 75.8,25.8 76,26 76.2,26.2 v76.4,26.4 | v77.2,27 77.4,27.2 77.6,27.2 77.6,29.6 77.8,29.8 78,30 78.2,30.2 78.4,30.4
  Bottom 0.2: v76.4,26.4 76.8,26.8 77,27 v77.2,27
ECG_RA  (via drill 0.3 pad 0.6)
  Top 0.2: 85.8,21.2 v86,21.2
  Bottom 0.2: v86,21.2 96.4,21.2
ECG_RA_F
  Top 0.15: U7.3 80.45,21 82.7,21
  Top 0.2: 90.6,21.2 90.4,21 90.2,20.8 88.2,20.8 88,21 87.8,21.2 | 83,20.8 85,20.8 85.2,20.6 86.6,20.6 86.6,21.2
ECG_REFIN  (via drill 0.3 pad 0.6)
  Top 0.15: U7.18 78,18.55 78,16.3
  Top 0.2: 70.8,13.2 70.8,15.6 70.8,13.2 | 70.8,13.2 70.6,13 | 70.6,13 70.2,12.6 | 70.2,12.6 69.6,12.6 70.2,12.6 | 70.8,13.2 70.6,13 | 70.6,13 70.2,12.6 | 77.8,16.2 v76,16.2 | 70.4,11.4 69.6,11.4 70.4,11.4
  Bottom 0.2: v76,16.2 v71.2,16.2
ECG_REFOUT
  Top 0.15: U7.8 78,23.45 78,25.7
  Top 0.2: 81,29.2 82.8,29.2 83,29.4 83.2,29.6 83.8,29.6 84,29.8 84.2,30 84.4,30.2 84.8,30.6 85,30.8 85.2,31 85.4,31.2 85.8,31.6 86,31.8 86.2,32 86.4,32.2 86.6,32.4 87.4,32.4 87.4,33.2 87.6,33.4 87.8,33.6 88,33.8 | 78.2,25.8 78.2,26 78.4,26.2 78.8,26.6 79,26.8 79.2,27 79.4,27.2 79.6,27.4 79.6,27.6 79.8,27.8 | 73,27.8 73.2,27.8 73.6,27.4 76.2,27.4 76.4,27.2 76.6,27 76.8,26.8 77,26.6 77.4,26.2 77.6,26 77.8,25.8 | 73,9.2 72.8,9.4 72.6,9.6 72.2,10 72,10 72,27.8
ECG_RL  (via drill 0.3 pad 0.6)
  Top 0.2: 87.8,26.6 v88,26.6
  Bottom 0.2: v88,26.6 93.8,26.6 94,26.4 94.2,26.2 94.4,26 94.8,25.6 95,25.4 95.2,25.2 95.4,25 95.8,24.6 96,24.4 96.2,24.2 96.4,24
ECG_RLD
  Top 0.15: U7.5 80.45,22 82.7,23.5
  Top 0.2: 83,23.8 83,24.2 83.8,25 84,25.2 84.4,25.6 87.8,25.6 88,25.8 88.2,26 88.2,26.2 88.6,26.6 90,26.6 90.4,26.2 90.6,26 90.8,25.8 91,25.6 92.2,25.6 92.2,20.8 91,20.8 90.8,20.6 90.6,20.4 89,20.4 88.8,20.2 88.6,20 88,19.4 87.8,19.2 87.6,19 87,18.4 86.8,18.2 86,17.4 85.8,17.2 | 84.8,26.4 84.8,25.6
ECG_RLDFB  (via drill 0.3 pad 0.6)
  Top 0.2: v93,21.6 v93,20.8
  Bottom 0.2: v80.2,21.6 83.2,21.6 83.6,22 83.8,22.2 84,22.4 84.6,23 84.8,23.2 85,23.4 85.6,24 85.8,24.2 86,24.4 87.2,24.4 87.2,22.6 87.6,22.2 87.8,22 88,21.8 92.6,21.8 92.8,21.6 v93,21.6 | v93,20.8 91.4,20.8 91,20.4 90.8,20.2 90.6,20 90,19.4 89.8,19.2 89.6,19 89,18.4 88.8,18.2 88,17.4 v87.8,17.2
ECG_SDN  (via drill 0.3 pad 0.6)
  Top 0.15: U7.13 75.55,21 73.3,21
  Top 0.2: 73,21.2 v72.4,21.2 | v70.4,21.2 70.2,21.4 | 29.8,49.6 v31.8,49.6 | v33.8,49.6 41.8,49.6 46.2,45.2 49.6,45.2 49.6,45 49.8,44.8 50,44.6 50.2,44.4 50.4,44.2 50.6,44 50.8,43.8 51,43.6 51.2,43.4 51.4,43.2 51.6,43 51.8,42.8 52,42.6 52.2,42.4 52.4,42.2 52.6,42 52.8,41.8 53,41.6 53.2,41.4 53.4,41.2 53.6,41 53.8,40.8 v54,40.6 | v57.6,35.6 58,35.2 58.8,35.2 58.8,35 59.6,34.2 59.6,33.8 59.8,33.6 60.2,33.6 60.2,33 60.4,32.8 60.6,32.6 61.2,32 61.4,31.8 61.6,31.6 61.6,30.8 61.8,30.6 62,30.4 62.2,30.2 62.4,30 62.6,29.8 62.8,29.6 63,29.4 63.2,29.2 63.4,29 63.6,28.8 63.8,28.6 64,28.4 64.2,28.2 64.4,28 64.6,27.8 64.8,27.6 65.2,27.2 65.2,26.2 65.4,26 65.6,25.8 65.8,25.6 66.2,25.2 66.4,25 66.6,24.8 66.8,24.6 67.2,24.2 67.4,24 67.6,23.8 67.8,23.6 68.2,23.2 68.4,23 68.6,22.8 68.8,22.6
  Top 0.25: U3.30 29.65,49.81
  Bottom 0.2: v72.4,21.2 v70.4,21.2 | v31.8,49.6 v33.8,49.6 | v54,40.6 54,39.2 54.2,39 54.4,38.8 54.6,38.6 54.8,38.4 55,38.2 55.2,38 55.4,37.8 55.6,37.6 56.2,37 56.4,36.8 56.6,36.6 57.2,36 57.4,35.8 v57.6,35.6
ECG_SW  (via drill 0.3 pad 0.6)
  Top 0.15: U7.6 79,23.45 80.5,25.7
  Top 0.2: 82.2,10.2 82.4,10.4 82.2,10.2 | 82.2,10.2 82,10 | 82,10 81.8,9.8 | 81.8,9.8 81.6,9.6 | 81.6,9.6 81.4,9.4 | 81.4,9.4 81.2,9.2 | 81.2,9.2 81,9 | 81,9 80.8,8.8 | 80.8,8.8 80.6,8.6 | 80.6,8.6 80.4,8.4 | 80.4,8.4 80.4,7.4 | 80.4,7.4 76.4,7.4 | 76.4,7.4 76,7.8 76.4,7.4 | 80.6,25.8 82.2,25.8 82.4,26 82.6,26.2 82.8,26.4 83,26.6 83.4,27 83.6,27.2 83.8,27.4 84,27.6 84.4,28 88.2,28 88.8,27.4 89,27.2 89.2,27 90.4,27 90.8,26.6 91,26.4 91.2,26.2 91.4,26 92.6,26 92.6,20.4 92.4,20.2 92.2,20 92,19.8 91.8,19.6 91.4,19.2 91.2,19 91,18.8 90.8,18.6 90.6,18.4 90.4,18.2 90,17.8 89.8,17.6 89.6,17.4 89.4,17.2 89,16.8 88.8,16.6 88.6,16.4 88.4,16.2 88.2,16 88.2,15.4 87.4,15.4 87.2,15.2 87,15 86.8,14.8 86.6,14.6 86.4,14.4 86.2,14.2 86,14 85.8,13.8 85.6,13.6 85.4,13.4 85.2,13.2 85,13 84.8,12.8 84.6,12.6 84.4,12.4 84.2,12.2 84,12 83.8,11.8 83.6,11.6 | 82.2,10.2 82,10 | 82,10 81.8,9.8 | 81.8,9.8 81.6,9.6 | 81.6,9.6 81.4,9.4 | 81.4,9.4 81.2,9.2 | 81.2,9.2 81,9 | 81,9 80.8,8.8 | 80.8,8.8 80.6,8.6 | 80.6,8.6 80.4,8.4 | 80.4,8.4 80.4,7.4 | 80.4,7.4 76.4,7.4 | 75.2,28.4 v75.4,28.4
  Bottom 0.2: v79.2,22.4 79.4,22.4 79.4,14.6 79.6,14.4 79.8,14.2 80,14 80.4,13.6 80.6,13.4 80.8,13.2 81,13 81.4,12.6 81.6,12.4 81.8,12.2 82,12 v82.4,11.6 | v75.4,28.4 77.6,28.4 77.8,28.2 78,28 78.8,27.2 79,27 79.8,26.2 80,26 v80.2,25.8
ESP_EN
  Top 0.25: U3.3 4.95,59.97
ESP_IO0  (via drill 0.3 pad 0.6)
  Top 0.2: v33.6,51.6 33.8,51.6 33.8,56.4 35.8,58.4 | 28.4,46.4 v28.6,46.4
  Top 0.25: U3.27 27.75,42.4
  Bottom 0.2: v34.2,48 34.2,50.8 34,51 33.8,51.2 33.6,51.4 v33.6,51.6 | v28.6,46.4 32.2,46.4 32.6,46.8 32.8,47 33,47.2 33.6,47.8 33.8,48 34,48.2 34.2,48.2 | 2.8,37.2 3,37.4 3.4,37.8 3.6,38 3.8,38.2 4,38.4 4.2,38.6 4.4,38.8 4.6,39 4.8,39.2 5,39.4 5.2,39.6 5.4,39.8 5.6,40 5.8,40.2 6,40.4 6.2,40.6 6.4,40.8 6.6,41 6.8,41.2 7,41.4 7.2,41.6 7.4,41.8 7.6,42 7.8,42.2 8,42.4 8.2,42.6 8.4,42.8 8.4,59.2 10.2,59.2 10.4,59.4 10.6,59.6 12,59.6 12.2,59.4 12.4,59.2 12.6,59 12.8,58.8 13,58.6 13.2,58.4 13.4,58.2 13.6,58 13.8,57.8 14,57.6 14.2,57.4 14.4,57.2 14.6,57 14.8,56.8 15,56.6 15.2,56.4 15.4,56.2 15.6,56 15.8,55.8 16,55.6 16,53 19,53 19.2,52.8 19.4,52.6 19.6,52.4 20,52 20.2,51.8 20.4,51.6 20.6,51.4 21,51 21.2,50.8 23,50.8 23.2,50.6 23.4,50.4 23.8,50 24,49.8 24.2,49.6 24.4,49.4 24.8,49 25,48.8 25.2,48.6 25.4,48.4 25.8,48 26,47.8 26.2,47.6 26.4,47.4 26.8,47 27,46.8 27.2,46.6 v27.2,46.4
FSR1_ADC  (via drill 0.3 pad 0.6)
  Top 0.2: 33.6,10.6 34.6,10.6 34.8,10.8 | 37.2,9.4 37,9.4 36.8,9.6 36.4,10 36.2,10.2 36,10.4 | v20,27.4 20,27 v19.6,26.6 | v30,11 31.8,11 32,10.8 32.2,10.6
  Top 0.25: U3.4 6.65,58.7
  Bottom 0.2: v9.6,58.2 9.6,42.4 10,42 10.2,41.8 10.4,41.6 10.6,41.4 11,41 11.2,40.8 11.2,38.4 11.4,38.2 11.6,38 11.6,37.8 12,37.4 12.2,37.2 12.4,37 12.6,36.8 13,36.4 13.2,36.2 13.4,36 13.6,35.8 14,35.4 14.2,35.2 14.4,35 14.6,34.8 15,34.4 15.2,34.2 15.4,34 15.6,33.8 16,33.4 16.2,33.2 16.4,33 16.6,32.8 17,32.4 17.2,32.2 19,30.4 19.2,30.2 19.4,30 19.4,28.2 19.6,28 20,27.6 v20,27.4 | v19.6,26.6 19.6,24 20,23.6 20.2,23.4 20.4,23.2 20.6,23 21,22.6 21.2,22.4 21.2,20.8 21.4,20.6 21.4,20.2 21.6,20 21.6,19.4 21.8,19.2 22,19 22.2,18.8 22.6,18.4 22.8,18.2 23,18 23.2,17.8 23.6,17.4 23.8,17.2 23.8,17 24,16.8 24.2,16.6 24.4,16.4 24.6,16.2 25,15.8 25.2,15.6 25.4,15.4 25.6,15.2 25.8,15 26,14.8 26.2,14.6 26.4,14.4 26.6,14.2 26.8,14 27,13.8 27.2,13.6 27.4,13.4 27.6,13.2 27.8,13 28,12.8 28.2,12.6 28.4,12.4 28.6,12.2 28.8,12 29,11.8 29.2,11.6 29.4,11.4 29.6,11.2 29.8,11 v30,11
FSR2_ADC  (via drill 0.3 pad 0.6)
  Top 0.2: 40.2,9.4 40,9.6 39.8,9.8 39.8,11.6 39.6,11.8 39.4,12 39.2,12.2 39.2,13.6 39,13.8 38.8,14 38.6,14.2 38.4,14.4 38.2,14.6 38,14.8 37.8,15 37.6,15.2 v37.6,17 | 42.8,8.2 42.6,8 41.6,8 41.6,8.2
  Top 0.25: U3.5 8.35,57.43
  Bottom 0.2: v37.6,17 37.6,17.2 36.4,17.2 | v10.2,57 10.2,42.6 10.4,42.4 10.6,42.2 10.8,42 11,41.8 11.2,41.6 11.4,41.4 11.6,41.2 11.8,41 12,40.8 12.2,40.6 12.4,40.4 12.6,40.2 12.8,40 13,39.8 13.2,39.6 13.4,39.4 13.6,39.2 13.8,39 14,38.8 14.2,38.6 14.4,38.4 14.6,38.2 14.8,38 15,37.8 15.2,37.6 15.4,37.4 15.6,37.2 15.8,37 16,36.8 16.2,36.6 16.4,36.4 16.6,36.2 16.8,36 17,35.8 17.2,35.6 17.4,35.4 17.6,35.2 17.8,35 18,34.8 18.2,34.6 18.4,34.4 18.6,34.2 18.8,34 19,33.8 19.2,33.6 19.4,33.4 19.6,33.2 19.8,33 20,32.8 20.2,32.6 20.4,32.4 20.6,32.2 20.8,32 21,31.8 21.2,31.6 21.6,31.2 21.8,31 22,30.8 22.2,30.6 22.6,30.2 22.8,30 23,29.8 23.2,29.6 23.6,29.2 23.8,29 24,28.8 24.2,28.6 24.6,28.2 24.8,28 24.8,26.8 26,26.8 26.2,26.6 26.6,26.2 26.8,26 27,25.8 27.2,25.6 27.6,25.2 27.8,25 28,24.8 28,24.2 31.4,20.8 32,20.8 32.2,20.6 32.4,20.4 32.6,20.2 32.8,20 33,19.8 33.2,19.6 33.4,19.4 33.6,19.4 33.6,19.2 33.8,19 34,18.8 34.2,18.6 34.4,18.4 34.6,18.2 34.8,18 35,17.8
FSR3_ADC  (via drill 0.3 pad 0.6)
  Top 0.2: 51,14.2 50.8,14.2 50.6,14.4 50.4,14.6 50,15 49.8,15.2 49.6,15.4 49.6,17.8 48.8,17.8 48.6,18 47,18 46.8,18.2 42.4,18.2 42.2,18.4 42,18.6 41.8,18.8 41.6,19 v41.4,19.2 | 49.6,9.4 49.8,9.6 50,9.8 50,12 50.2,12.2 50.4,12.4 50.6,12.6 50.8,12.8 51,13 | 11,55.8 11.4,55.8 11.4,55.4 11.6,55.2 v11.6,52.4 | v11.6,48.4 v11.6,46 | v28.4,29 28.4,28.4 28.6,28.4 28.8,28.2 29,28 29.2,27.8 29.8,27.2 30,27 30.2,26.8 30.8,26.2 31,26 31.2,25.8 31.8,25.2 31.8,25 34,25 34,24.8 34.2,24.6 34.4,24.4 34.6,24.2 34.8,24 35,23.8
  Bottom 0.2: v41.4,19.2 40,19.2 39.8,19.4 39.6,19.6 39.4,19.8 39.2,20 39,20.2 38.8,20.4 38.6,20.6 38.4,20.8 38.2,21 38,21.2 37.8,21.4 37.4,21.8 37.2,22 37,22.2 36.8,22.4 36.4,22.8 | v11.6,52.4 v11.6,48.4 | v11.6,46 11.6,44.8 11.8,44.6 12,44.4 12.2,44.2 12.4,44 12.6,43.8 12.8,43.6 13,43.4 13.2,43.2 13.4,43 13.6,42.8 13.8,42.6 14,42.4 14.2,42.2 14.4,42 14.6,41.8 14.8,41.6 15,41.4 15.2,41.2 15.4,41 15.6,40.8 15.8,40.6 16,40.4 16.2,40.2 16.4,40 16.6,39.8 16.8,39.6 17,39.4 17.2,39.2 17.4,39.2 17.6,39 17.8,38.8 18,38.6 18.2,38.4 18.4,38.2 18.6,38 18.8,37.8 19,37.6 19.2,37.4 19.4,37.2 19.6,37 19.8,36.8 20,36.6 20.2,36.4 20.4,36.2 20.6,36 20.8,35.8 21,35.6 21.2,35.4 21.4,35.2 21.6,35 21.8,34.8 22,34.6 22.2,34.4 22.4,34.2 22.6,34 22.8,33.8 23,33.6 23.2,33.4 23.4,33.2 23.6,33 23.8,32.8 24.8,32.8 25,32.6 25.2,32.4 25.4,32.2 25.6,32 26,31.6 26.2,31.4 26.4,31.2 26.6,31 27,30.6 27.2,30.4 27.4,30.2 27.6,30 28,29.6 28.2,29.4 28.4,29.2 v28.4,29
FSR4_ADC  (via drill 0.3 pad 0.6)
  Top 0.2: 53.8,14.2 v52.8,14.2 | v43.6,20 43.4,20.2 43,20.6 42.8,20.8 42.6,21 42.4,21.2 42,21.6 41.8,21.8 41.6,22 v41.4,22.2 | 51.8,7.6 51.6,7.8 51.4,8 51.4,11.8 51.6,12 51.8,12.2 52,12.4 52.2,12.6 52.8,12.6 53,12.8 53.2,13 53.8,13 | v32.8,32.4 33.2,32 33.4,31.8 33.8,31.4 34,31.2 34.2,31 34.4,30.8 34.8,30.4 35,30.2 35.2,30
  Bottom 0.2: v52.8,14.2 50.6,14.2 50.4,14.4 50.2,14.6 50,14.8 49.8,15 49.6,15.2 49.4,15.4 49.2,15.6 49,15.8 48.8,16 48.6,16.2 48.4,16.4 48,16.8 47.8,17 47.6,17.2 47.4,17.4 47,17.8 46.8,18 46.6,18.2 46.4,18.4 46,18.8 45.8,19 45.6,19.2 45.4,19.4 45,19.8 44.8,20 v43.6,20 | v41.4,22.2 41,22.6 40.8,22.8 40.6,23 40.4,23.2 40,23.6 39.8,23.8 39.6,24 39.6,24.8 39.4,25 39.2,25.2 39,25.4 38.8,25.6 38.6,25.8 38.4,26 38.2,26.2 38,26.4 37.8,26.6 37.4,27 37.2,27.2 37,27.4 36.8,27.6 36.4,28 36.2,28.2 36,28.4 | v11,54.4 11,54.2 11.2,54 11.4,53.8 11.6,53.6 11.8,53.4 12,53.2 12.2,53 12.4,52.8 12.6,52.6 12.8,52.4 13,52.2 13.2,52 13.4,51.8 13.6,51.6 13.8,51.4 14,51.2 14.2,51 14.4,50.8 14.6,50.6 14.8,50.4 15,50.2 15.2,50 15.4,49.8 15.6,49.6 15.8,49.4 16.2,49 16.4,48.8 16.6,48.6 16.8,48.4 17.2,48 17.4,47.8 17.6,47.6 17.8,47.4 18.2,47 18.4,46.8 18.6,46.6 18.8,46.4 19,46.2 19.2,46 19.4,45.8 19.6,45.6 19.8,45.4 20,45.2 20.2,45 20.4,44.8 20.6,44.6 20.8,44.4 21,44.2 21.2,44 21.4,43.8 21.6,43.6 21.8,43.4 22,43.2 22.2,43 22.4,42.8 22.6,42.6 22.8,42.4 23,42.2 23.2,42 23.4,41.8 23.6,41.6 23.8,41.4 24,41.2 24.2,41 24.4,40.8 24.6,40.6 24.8,40.4 25,40.2 25.2,40 25.4,39.8 25.6,39.6 25.8,39.4 26,39.2 26.2,39 26.4,38.8 26.6,38.6 26.8,38.4 27,38.2 27.2,38 27.4,37.8 27.8,37.4 28,37.2 28.2,37 28.4,36.8 28.8,36.4 29,36.2 29.2,36 29.4,35.8 29.8,35.4 30,35.2 30.2,35 30.4,34.8 30.8,34.4 31,34.2 31.2,34 31.4,33.8 31.8,33.4 32,33.2 v32.8,32.4
GND  (via drill 0.3 pad 0.55, 0.3 pad 0.6)
  Top 0.15: U5.3 44.7,38.75 47.65,38.42 | U5.2 44.7,39.25 46.4,39.58 | U5.1 44.7,39.75 47.65,40.73 | U5.7 42.5,37.3 41.85,35.6 | U5.6 43,37.3 43,34.35 | U7.16 77,18.55 75.5,16.3
  Top 0.2: U4.2 51,39.5 48.4,39.5 | U4.4 54,38.85 55.4,38.35 | U8.5 38.8,18.86 35.3,18.8 | U8.4 38.8,20.14 36.8,20.2 | U8.10 45.7,15.3 | 45.7,15.3 43.7,13.3 | U8.9 45.7,15.3 | 45.7,15.3 45.1,11.8 | U8.14 47.2,21.41 50.7,21.6
  Top 0.25: U1.1 15.4,16.91 | U1.3 15.4,14.37 | U3.1 6.65,62.51 | U3.40 31.35,62.51 | U6.4 45.4,32.09 | U6.8 54.6,35.91
  Top 0.3: 15.4,16.91 v15.4,17.61 | 15.4,14.37 v15.4,13.66 | R1.2 v25.45,11.9 | C1.2 v13,15.22 | C2.2 v16.4,29.95 | U2.2 v11,19.45 | C3.2 v14.5,19.23 | C4.2 v20.4,20.7 | C5.2 v23.4,20.7 | R6.2 v23.6,24.95 | C6.2 v27.5,28.73 | TP3.TP v24.5,33.45 | 6.65,62.51 v6.65,61.81 | 31.35,62.51 v31.35,63.21 | C7.2 v5.2,62.45 | C8.2 v5.2,58.45 | C10.2 v4.8,53.23 | D3.1 v43.27,59 | D4.1 v44.55,52.6 | 48.4,39.5 v48.4,40.2 | 55.4,38.35 v55.4,39.05 | C11.2 v48.5,47.48 | 47.65,40.73 v47.65,41.42 | 46.4,39.58 v46.4,40.27 | 47.65,38.42 v47.65,39.12 | 43,34.35 v43,35.05 | 41.85,35.6 v41.85,36.3 | C12.2 v38.9,36.45 | C13.2 v37.5,41.73 | 45.4,32.09 v45.4,32.8 | 54.6,35.91 v54.6,36.6 | C14.2 v44.75,33.73 | C15.2 v55.25,33.73 | U7.14 v77.35,20.5 | 75.5,16.3 v75.5,17 | R24.2 v74.22,11 | C16.2 v70.2,13.95 | C22.2 v89.45,32.4 | R32.2 v69.5,27.23 | C23.2 v75.95,14.9 | C24.2 v78.95,12.4 | 36.8,20.2 v37.5,20.2 | 35.3,18.8 v36,18.8 | 45.1,11.8 v45.1,12.5 | 43.7,13.3 v43.7,14 | 50.7,21.6 v50.7,22.3 | U8.15 v45.7,21.68 | C25.2 v33,17.23 | C26.2 v34.4,21.95 | C27.2 v50.35,21.95 | C28.2 v33,27.23 | R33.2 v31.6,11.95 | C29.2 v38,11.97 | R34.2 v41,11.97 | C30.2 v43.5,11.97 | R35.2 v49,11.97 | C31.2 v53.15,15.45 | R36.2 v53.9,8.95 | C32.2 v55.9,15.45 | R37.2 v59.4,11.45 | C33.2 v55.6,15.45 | R38.2 v56.4,8.95 | R40.2 v56.75,20.73 | C35.2 v60.9,16.95 | D6.2 v54,25.55 | C36.2 v46.5,11.97 | Q1.2 v75.95,59.05 | R44.2 v71.4,56.45 | C37.2 v75,66.22 | Q2.2 v75.95,54.55 | R47.2 v71.4,49.95 | C38.2 v79,53.73 | C39.2 v53.5,58.23
  other vias: 16.65,53.65 16.65,54.75 16.65,55.85 17.75,53.65 17.75,54.75 17.75,55.85 18.85,53.65 18.85,54.75 18.85,55.85 52.5,39.95 52.5,39.05 78.7,21.7 77.3,21.7 78.7,20.3 77.3,20.3 7,7 7,18 7,29 7,40 7,62 18,7 18,18 18,29 18,40 18,51 18,62 29,7 29,18 29,29 29,40 29,62 40,7 40,29 40,40 40,51 40,62 51,7 51,29 51,62 62,7 62,18 62,29 62,51 62,62 73,7 73,18 73,40 73,51 73,62 84,7 84,18 84,29 84,40 84,51 84,62
  pour Route2 (isolate 0.4): 0.5,0.5 99.5,0.5 99.5,69.5 29.5,69.5 29.5,63 0.5,63
HALL_LIMIT  (via drill 0.3 pad 0.6)
  Top 0.2: 47.2,8.2 47.2,4.6 47.4,4.4 47.6,4.2 47.8,4 48,3.8 | 33.6,7.4 38,7.4 38.4,7 38.6,6.8 38.8,6.6 39,6.4 39.2,6.2 43.8,6.2 44,6.4 44.4,6.8 44.6,7 44.8,7.2 45,7.4 45.4,7.8 45.6,8 45.8,8.2 | 27,55.2 25.2,55.2 25,55.4 24.4,55.4 24.2,55.6 24,55.8 23.8,56 v23.6,56.2 | v19.4,60.2 13,60.2 12.8,60.4 12.6,60.6 12.4,60.8 12.2,61 12,61.2 11.8,61.4 v11.6,61.6 | v5.8,41 5.8,39.6 6,39.4 6.4,39 6.6,38.8 6.8,38.6 7,38.4 7.4,38 7.6,37.8 7.8,37.6 8,37.4 8.2,37.2 8.4,37 8.6,36.8 8.8,36.6 9,36.4 9.2,36.2 9.4,36 9.6,35.8 10,35.4 10.2,35.2 10.4,35 10.6,34.8 11,34.4 11.2,34.2 11.4,34 11.6,33.8 12,33.4 12.2,33.2 12.4,33 v12.6,32.8
  Top 0.25: U3.34 31.35,54.89
  Bottom 0.2: v23.6,56.2 23.4,56.4 23.2,56.6 23,56.8 22.8,57 22.4,57.4 22.2,57.6 22,57.8 21.8,58 21.4,58.4 21.2,58.6 21,58.8 20.8,59 20.4,59.4 20.2,59.6 20,59.8 19.8,60 19.6,60.2 v19.4,60.2 | v11.6,61.6 10.2,61.6 10,61.8 9.8,62 9.6,62.2 9.4,62.4 9.2,62.6 9,62.8 6.4,62.8 6.2,63 6,63.2 5.8,63.4 4.6,63.4 4.4,63.2 4.4,56.2 4.6,56 4.6,54.6 4.4,54.4 4,54 4,52.2 4.2,52 4.4,51.8 4.6,51.6 4.8,51.4 5,51.2 5.2,51 5.4,50.8 5.6,50.6 5.8,50.4 6,50.2 6.2,50 6.2,42.8 6,42.6 5.8,42.4 v5.8,41 | v12.6,32.8 13,32.4 13.2,32.2 13.4,32 14.4,32 14.6,31.8 16.8,31.8 17.2,31.4 17.4,31.2 17.6,31 18.2,30.4 18.4,30.2 18.6,30 19,29.6 19,27.8 19.2,27.6 19.6,27.2 19.8,27 20,26.8 20.2,26.6 20.6,26.2 20.8,26 21,25.8 21.2,25.6 21.2,25.4 21.4,25.2 21.6,25 22,24.6 22.2,24.4 22.4,24.2 22.6,24 23,23.6 23.2,23.4 23.4,23.2 23.4,22.2 23.6,22 24,21.6 24.2,21.4 24.2,17.4 24.4,17.2 25,16.6 25.2,16.4 25.4,16.2 26,15.6 26.2,15.4 26.4,15.2 26.6,15 27,14.6 27.2,14.4 27.4,14.2 27.6,14 28,13.6 28.2,13.4 28.4,13.2 28.6,13 29,12.6 29.2,12.4 29.4,12.2 29.6,12 30,11.6 30.2,11.4 30.4,11.2 30.6,11 31,10.6 31.2,10.4 31.4,10.2 31.6,10 32,9.6 32.2,9.4 v32.2,8.6
HX_BASE  (via drill 0.3 pad 0.6)
  Top 0.2: 39.6,22.4 v39.6,22.2 | v42,20 42.4,19.6 42.6,19.4 42.8,19.2 v44.2,19.2
  Bottom 0.2: v39.6,22.2 39.6,22 39.8,21.8 40,21.6 40.4,21.2 40.8,21.2 41,21 41.4,20.6 41.6,20.4 41.8,20.2 v42,20 | v44.2,19.2 44.8,19.2 45,19 45.4,18.6 45.6,18.4 45.8,18.2 46,18 46.4,17.6 46.6,17.4 46.8,17.2 47,17 47.4,16.6 47.6,16.4 47.8,16.2 48,16 48.4,15.6 48.6,15.4 48.8,15.2 49,15 49.4,14.6 49.6,14.4 49.8,14.2 50,14 50.2,13.8 51.8,13.8 52,13.6 56.8,13.6 56.8,14.8 56.6,15 56.6,16.2 56.4,16.4 56,16.8 56,17.4 v52.4,17.4
HX_DOUT  (via drill 0.3 pad 0.6)
  Top 0.2: U8.12 47.2,18.86 50.7,18.8 | 51,19 52.8,19 52.8,20 53,20.2 53.4,20.6 53.6,20.8 54.6,20.8 54.8,21 55,21.2 55.6,21.2 55.6,23.2 | 22.4,42.6 22.6,42.4 v22.6,39.6 | v23.4,33.8 v23.4,32.4 | v23.8,29.6 v23.8,28.4 | v24.4,26 23.4,26 23.2,25.8 23,25.6 v23,24.4 | v23.8,23.6 24,23.4 24,22 27.6,22 27.8,22.2 28,22.4 28.2,22.6 28.6,23 28.8,23.2 29,23.4 v29.2,23.6 | v46.8,16.6 46.8,17.2 47.6,17.2 47.8,17 v48.4,17 | v47.4,18.4 47.2,18.6 46.4,18.6
  Top 0.25: U3.23 22.18,42.85
  Bottom 0.2: v22.6,39.6 22.6,39.4 23,39 23.2,38.8 23.4,38.6 v23.4,33.8 | v23.4,32.4 23.6,32.2 23.8,32 v23.8,29.6 | v23.8,28.4 23.8,28.2 24,28 24.2,27.8 24.4,27.6 v24.4,26 | v23,24.4 23,24.2 23.2,24.2 23.4,24 v23.8,23.6 | v29.2,23.6 29.4,23.6 29.8,23.2 30,23 30.2,22.8 30.8,22.2 31,22 31.2,21.8 31.2,21.6 32.8,21.6 33,21.4 33.2,21.2 33.4,21 33.8,20.6 34,20.4 34.2,20.2 34.4,20 34.8,19.6 38.8,19.6 39,19.4 39.2,19.2 39.4,19 39.6,18.8 40.4,18.8 40.6,18.6 40.8,18.4 42.8,18.4 43,18.2 43.2,18 43.6,18 43.8,17.8 44,17.6 44.2,17.4 44.4,17.2 46,17.2 46.4,16.8 46.6,16.6 v46.8,16.6 | v48.4,17 48.4,17.4 48,17.8 47.8,18 47.6,18.2 v47.4,18.4
HX_SCK  (via drill 0.3 pad 0.6)
  Top 0.2: U8.11 47.2,17.59 49.2,17.4 | v42.8,21.6 42.8,23.8 v42.6,24 | v41.8,27.8 41.8,28.4 41.6,28.6 41.4,28.8 41.2,29 41,29.2 40.8,29.4 40.6,29.6 39.8,29.6 39.8,30.2 39.6,30.4 39.4,30.6 v39.2,30.8 | v35.8,33.4 35,34.2 34.6,34.2 34.6,34.6 v34.4,34.8 | v33.8,35.6 33.8,39.6 33.6,39.8 33.4,40 33.2,40.2 32.6,40.8 32.4,41 v32.2,41.2 | v30.4,43 30.2,43.2 30,43.4 29.8,43.6 29.6,43.8 29.4,44 29.2,44.2 29,44.4 28.8,44.6 28.6,44.8 28.4,45 v28.2,45.2 | v26,47.2 v26,48.4 | v26.4,50 26.6,50.2 26.6,50.6 27,50.6
  Top 0.25: U3.31 31.35,51.08
  Bottom 0.2: v45,17.8 44.8,18 44.6,18.2 44.4,18.4 43.6,18.4 43.4,18.6 43,19 42.8,19.2 v42.8,21.6 | v42.6,24 42.4,24.2 42.4,26.6 42,27 41.8,27.2 v41.8,27.8 | v39.2,30.8 39,31 38.8,31.2 38.6,31.4 38.4,31.6 38,32 37.8,32.2 37.6,32.4 37.4,32.6 37.2,32.8 37,33 36.8,33.2 36.6,33.4 v35.8,33.4 | v34.4,34.8 33.8,35.4 v33.8,35.6 | v32.2,41.2 32,41.4 31.8,41.6 31.6,41.8 31.4,42 31.2,42.2 31,42.4 30.8,42.6 30.6,42.8 v30.4,43 | v28.2,45.2 28,45.4 26,45.4 v26,47.2 | v26,48.4 26,49.6 26.2,49.8 v26.4,50
HX_VBG  (via drill 0.3 pad 0.6)
  Top 0.2: U8.6 38.8,17.59 36.8,17.4 | 36.8,17.2 v36.8,16.4
  Bottom 0.2: v36.8,16.4 36.6,16.2 36.4,16 34.8,16 34.4,15.6 34.4,15.4 34.2,15.2 34,15 33.8,14.8 v33.6,14.6
HX_XO  (via drill 0.3 pad 0.6)
  Top 0.2: U8.13 47.2,20.14 49.2,20.2 | 49,20.4 v49,21
  Bottom 0.2: v49,21 48.8,21.2 48.8,22.8 49.8,22.8 50,23 50.4,23 50.6,23.2 50.8,23.4 v51,23.6
I2C_SCL  (via drill 0.3 pad 0.6)
  Top 0.15: U5.13 43,40.7 43,43.65
  Top 0.2: U4.1 51,40.15 49.6,40.65 | 43.2,43.4 45.2,43.4 45.4,43.2 45.6,43 45.8,42.8 46,42.6 46.2,42.4 46.4,42.2 48.4,42.2 48.6,42 48.8,41.8 49,41.6 v52.4,41.6 | v59.4,45.4 60.6,46.6 v60.6,47.4 | v62.4,50.2 64.8,50.2 65,50.4 65.2,50.6 65.4,50.8 65.6,51 v65.8,51.2 | v66.6,39.6 66.4,39.4 66,39 65.8,38.8 65.6,38.6 65.6,29.2 65.4,29 v65.4,28.8 | v64.2,24.4 64,24.2 63.8,24 63.6,23.8 63.4,23.6 63,23.2 62.8,23 62.6,22.8 62.4,22.6 62,22.2 61.8,22 61.6,21.8 61.4,21.6 61,21.2 60.8,21 60.6,20.8 60.4,20.6 v60,20.2 | 49.4,40.8 49.4,41.6 | 58.8,51.2 v59,51.2 | 40.8,46.4 41,46.4 41.4,46 41.4,45.2 41.6,45 41.8,44.8 42,44.6 42.2,44.4 42.4,44.2 42.6,44 42.8,43.8 | 9.6,52.6 8.4,52.6 8.2,52.8 8,53 7.8,53.2 7.6,53.4 7.6,55 v7.4,55 | v41,65.2 42.6,65.2 42.8,65 43,65 43.2,64.8 43.4,64.6 43.6,64.4 43.8,64.2 44,64 44.2,63.8 44.8,63.2 47.8,63.2 48,63 48.2,62.8 48.8,62.2 v48.8,62 | v48,58 47.8,57.8 47.8,53 47.6,52.8 47.4,52.6 46,52.6 45.6,52.2 45.4,52 45.2,51.8 45,51.8 44.8,51.6 44.6,51.4 44.4,51.2 44.2,51 44,50.8 43.8,50.6 43.6,50.4 43.4,50.2 43.2,50 43,49.8 v42.8,49.6
  Bottom 0.2: v52.4,41.6 54.2,41.6 54.8,42.2 56.2,42.2 v59.4,45.4 | v60.6,47.4 60.6,48 60.8,48.2 60.8,48.6 61,48.8 61.2,49 | 61.2,49 61.4,49.2 61.6,49.4 61.8,49.6 62,49.8 62.2,50 v62.4,50.2 | v65.8,51.2 66,51.4 66.4,51.4 66.6,51.6 66.8,51.8 67,52 67.4,52.4 67.6,52.6 69.2,52.6 69.4,52.4 69.4,42.4 69,42 68.8,41.8 68.6,41.6 68.4,41.4 68,41 67.8,40.8 67.6,40.6 67.4,40.4 67,40 66.8,39.8 v66.6,39.6 | v65.4,28.8 65.4,25.6 65,25.2 64.8,25 64.6,24.8 v64.2,24.4 | v60,20.2 59.8,20 59.8,19.8 59.6,19.6 59.4,19.4 59.2,19.2 59,19 58.8,18.8 58.6,18.6 58.4,18.4 58.2,18.2 58.2,15.6 58,15.4 57.8,15.2 57.8,12.8 57.6,12.6 57.4,12.4 57.2,12.2 57.2,8.2 57,8 56.8,7.8 56.8,7.2 56.6,7 55.6,7 55.4,6.8 55.2,6.6 52,6.6 51.8,6.4 51.6,6.2 46.2,6.2 46,6 45.8,5.8 45.6,5.6 45.4,5.4 45,5 44.8,4.8 44.6,4.6 44.4,4.4 44,4 43.8,3.8 43.6,3.6 43.4,3.4 43,3 42.8,2.8 42.6,2.6 42.4,2.4 42,2 41.8,1.8 31.6,1.8 31.4,2 31.2,2.2 31,2.4 30.8,2.6 | v59,51.2 59.2,51.2 60.8,49.6 60.8,49.4 61,49.2 61.2,49 | v7.4,55 7.4,56.8 7.2,57 7,57.2 6.8,57.4 6.6,57.6 6.6,59.2 6.8,59.4 7,59.6 7,60.4 7.2,60.6 9,60.6 9.2,60.8 9.4,61 26.6,61 27,61.4 27.2,61.6 27.4,61.8 27.6,62 28,62.4 28.2,62.6 28.4,62.8 29.4,62.8 29.6,63 29.6,63.8 29.8,64 30,64.2 30.2,64.4 30.4,64.6 30.6,64.8 31,65.2 31.2,65.4 31.4,65.6 31.6,65.8 32,66.2 32.2,66.4 32.4,66.6 32.6,66.8 32.8,67 33,67.2 33.2,67.4 33.4,67.6 33.6,67.8 33.8,68 34,68.2 34.2,68.4 34.4,68.6 35.4,68.6 35.6,68.8 37,68.8 37.2,68.6 37.2,67.2 37.4,67 37.6,66.8 37.8,66.6 38,66.4 38.4,66 38.6,65.8 38.8,65.6 39,65.4 39.2,65.2 v41,65.2 | v48.8,62 48.8,60.2 48.6,60 48.6,59.8 48.4,59.6 48.4,58.4 v48,58
  Bottom 0.2: v42.8,49.6 42.6,49.4 42.4,49.2 42.2,49 42,48.8 41.8,48.6 41.6,48.4 41.4,48.2 41.2,48 41,47.8 v40.8,47.6
I2C_SDA
  Top 0.15: U5.14 43.5,40.7 44.15,42.4
  Top 0.2: U4.6 54,40.15 55.4,40.65
  Top 0.25: U3.8 8.35,53.62
IMU_INT1  (via drill 0.3 pad 0.6)
  Top 0.15: U5.4 44.7,38.25 46.4,37.27
  Top 0.2: 46.6,37 v46.6,36.6 | 11,50.6 17,50.6 17.2,50.4 17.6,50.4 18,50 18.2,49.8 18.4,49.6 18.6,49.4 v18.8,49.2 | v24.4,48.8 v26.6,48.8 | v28.8,48 29,47.8 29.2,47.6 29.4,47.4 29.8,47 30,46.8 30.2,46.6 30.4,46.4 v30.8,46 | v31.6,46 31.8,45.8 32,45.6 32.2,45.4 32.4,45.2 32.6,45 32.8,44.8 33,44.6 33.2,44.4 33.4,44.2 33.6,44 33.6,43.2 v33.8,43.2 | v40,37 40.2,36.8 40.4,36.6 40.6,36.4 40.8,36.2 41,36 41.2,35.8 41.2,35.6 41.4,35.4 41.4,35.2 41.6,35 41.8,34.8 42,34.6 42.2,34.4 42.4,34.2 42.6,34 42.8,33.8 42.8,33.2 43,33 43.2,32.8 43.4,32.6 43.6,32.4 43.6,29 43.8,28.8 44,28.6 45.4,28.6 45.6,28.8 45.8,29 46,29.2 46.8,29.2
  Top 0.25: U3.10 6.65,51.08
  Bottom 0.2: v46.6,36.6 47.2,36 47.4,35.8 47.6,35.6 48.2,35 48.4,34.8 48.6,34.6 49.2,34 49.2,31.8 49,31.6 48.8,31.4 48.6,31.2 48.4,31 v48.2,30.8 | v18.8,49.2 22.4,49.2 22.6,49 22.8,48.8 v24.4,48.8 | v26.6,48.8 28,48.8 28.2,48.6 28.4,48.4 v28.8,48 | v30.8,46 v31.6,46 | v33.8,43.2 34,43 34.2,42.8 34.4,42.6 34.6,42.4 34.8,42.2 35,42 35.2,41.8 36,41.8 36.8,41 38.8,41 39,40.8 40.4,40.8 40.6,40.6 40.6,37.8 40.4,37.6 40.2,37.4 40.2,37.2 40,37.2 v40,37
IMU_INT2  (via drill 0.3 pad 0.6)
  Top 0.15: U5.9 41.3,38.75
  Top 0.2: 41,38.8 40,38.8 v39.8,39 | v19.8,46 14.8,46 14.6,46.2 14.4,46.4 14.2,46.6 14,46.8 13.8,47 13.6,47.2 13.4,47.4 13.2,47.6 13,47.8 12.8,48 12.6,48.2 12.4,48.4 12.2,48.6 12,48.8 11.8,49 11.6,49.2 11.4,49.4 11,49.4
  Top 0.25: U3.11 8.35,49.81
  Bottom 0.2: v39.8,39 39.6,39.2 26.8,39.2 26.6,39.4 26.4,39.6 26.2,39.8 26,40 25.6,40.4 25.4,40.6 25.2,40.8 25,41 24.6,41.4 24.4,41.6 24.2,41.8 24,42 23.6,42.4 23.4,42.6 23.2,42.8 23,43 22.6,43.4 22.4,43.6 22.2,43.8 22,44 21.6,44.4 21.4,44.6 21.2,44.8 21,45 20.6,45.4 20.4,45.6 20.2,45.8 20,46 v19.8,46
IMU_OCS_AUX
  Top 0.15: U5.10 41.3,39.25 39.6,39.58
IO3_SPARE  (via drill 0.3 pad 0.6)